# Altium PCB FLX5.PcbDoc (part 1 of 4)
Units mm, origin at the board's own origin, x right, y up, seen from the top; angles counter-clockwise.
Board outline 45.2 x 54.5 mm, 4 copper layers (Top Layer, gndplane, vplane, Bottom Layer), stack 1.596 mm thick; 151 components, 82 nets, 455 pads, 132 vias.
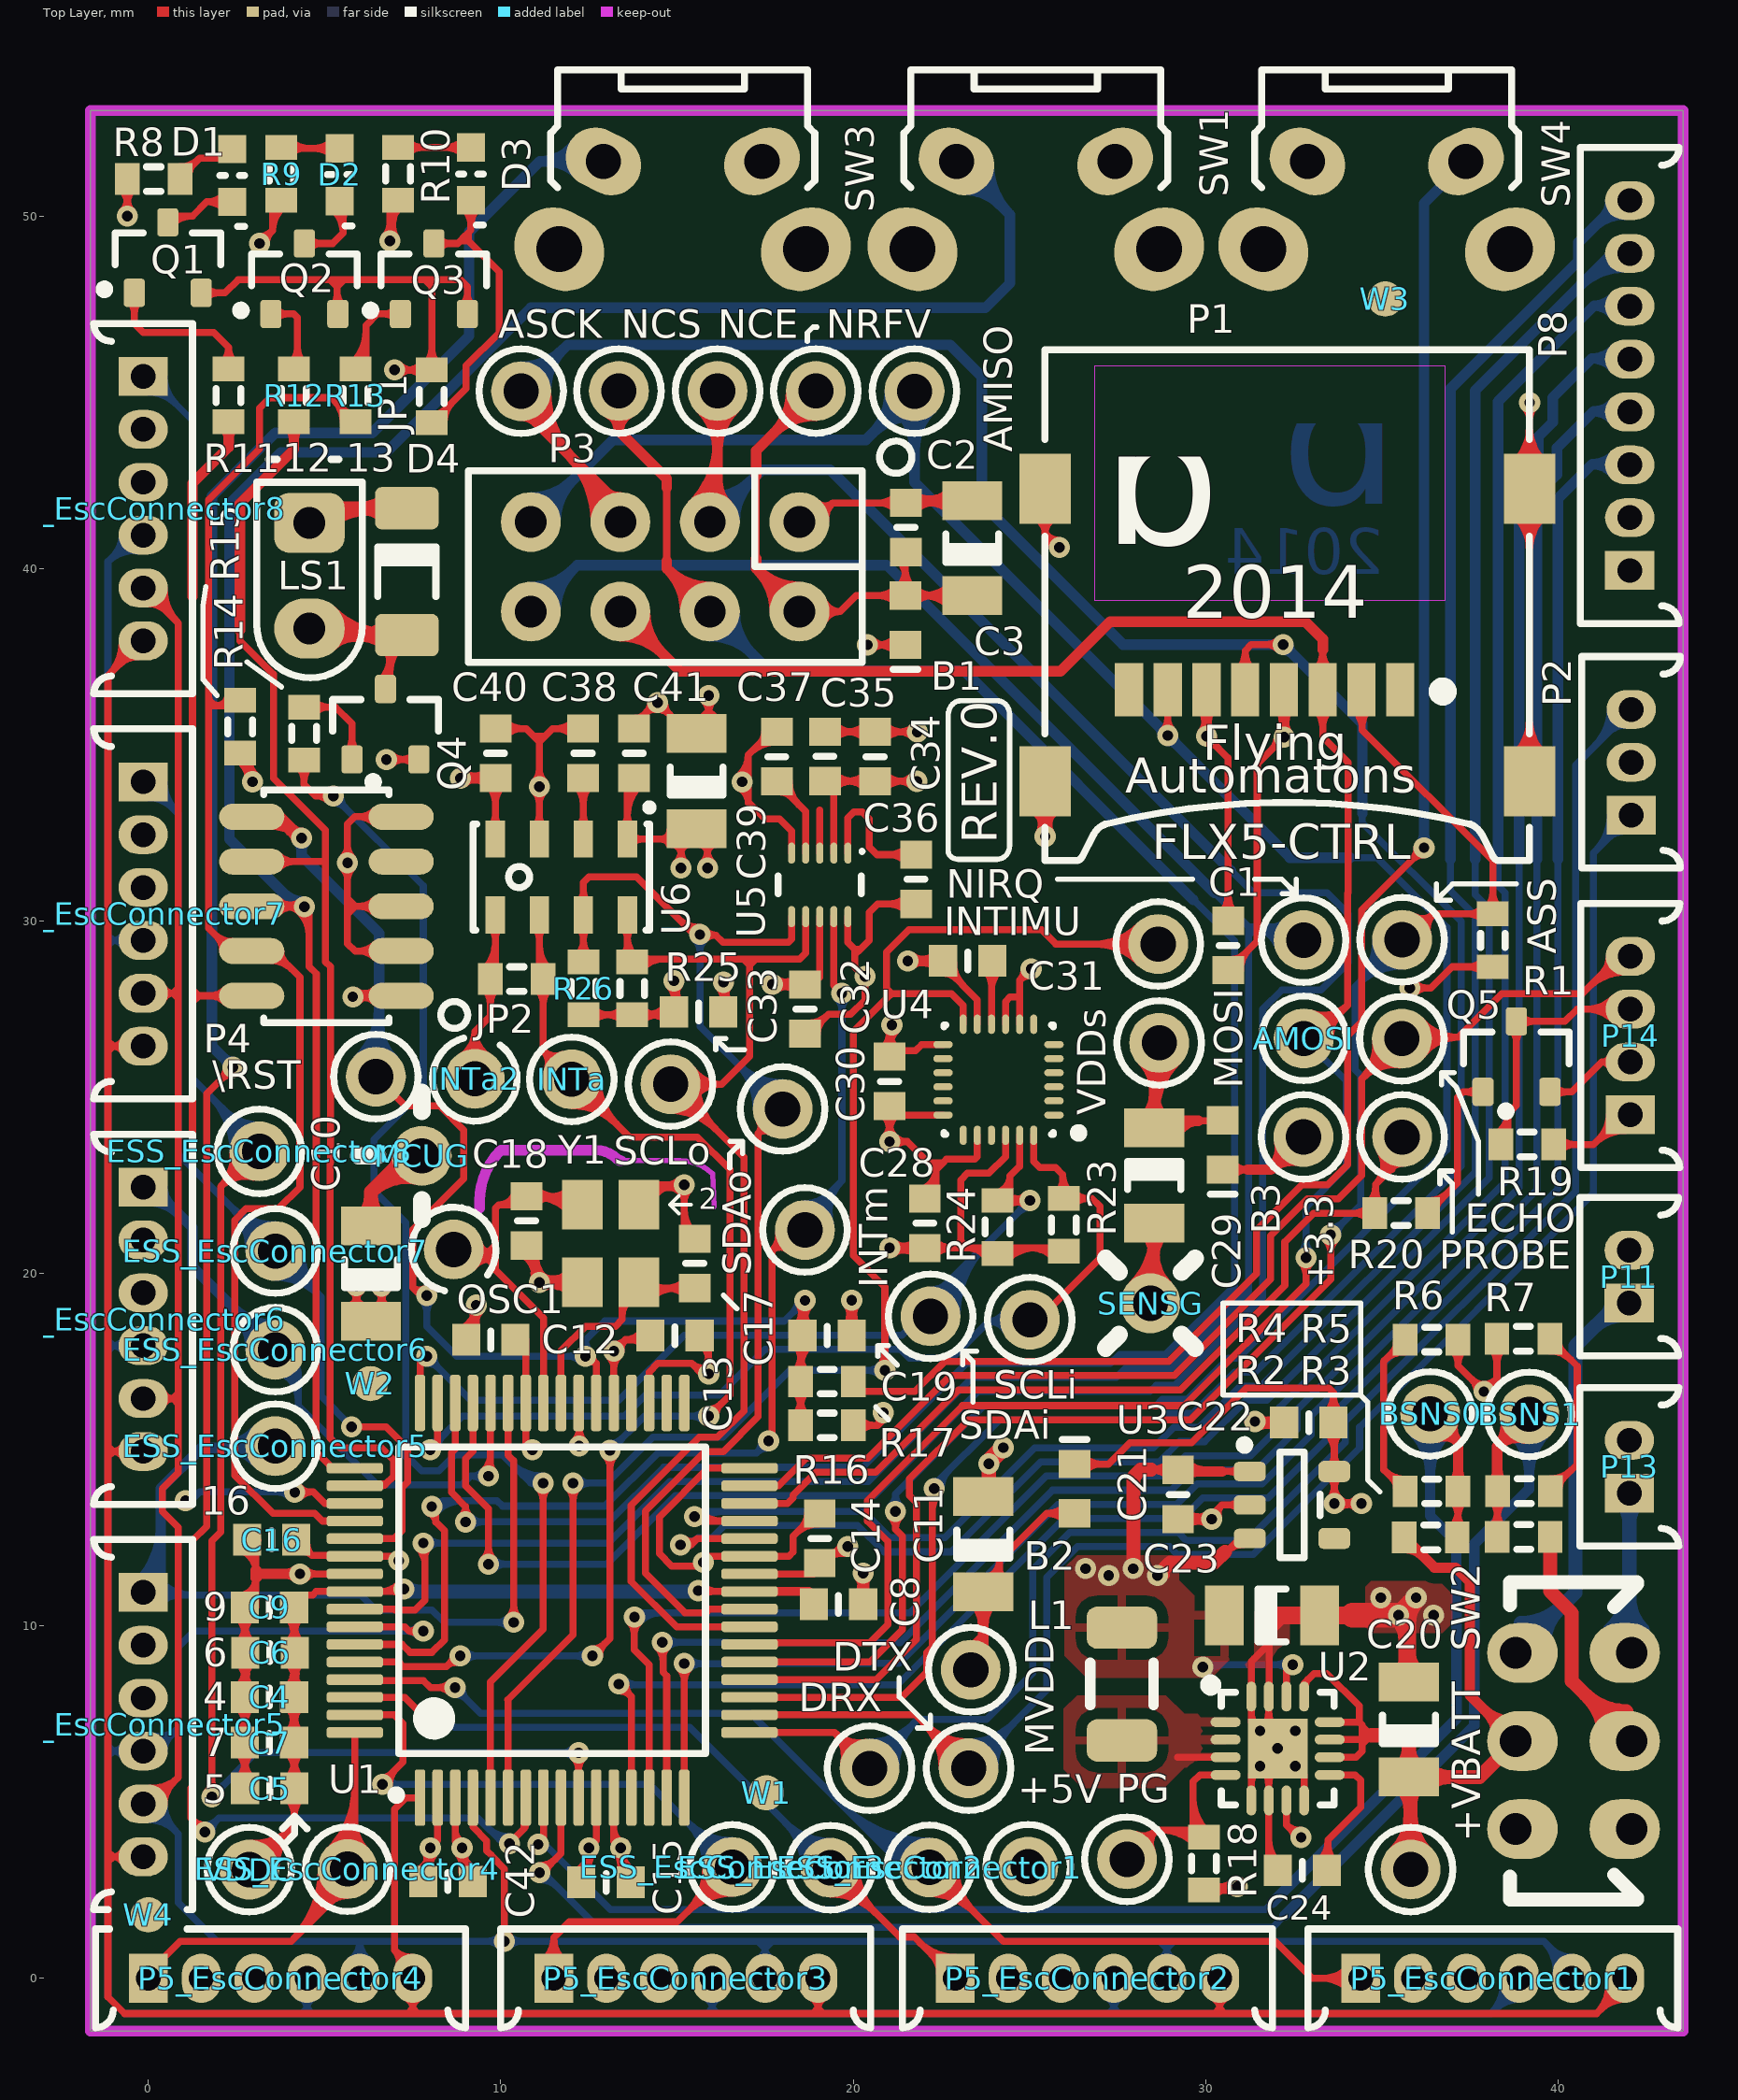
[diagram p0: Top Layer view]
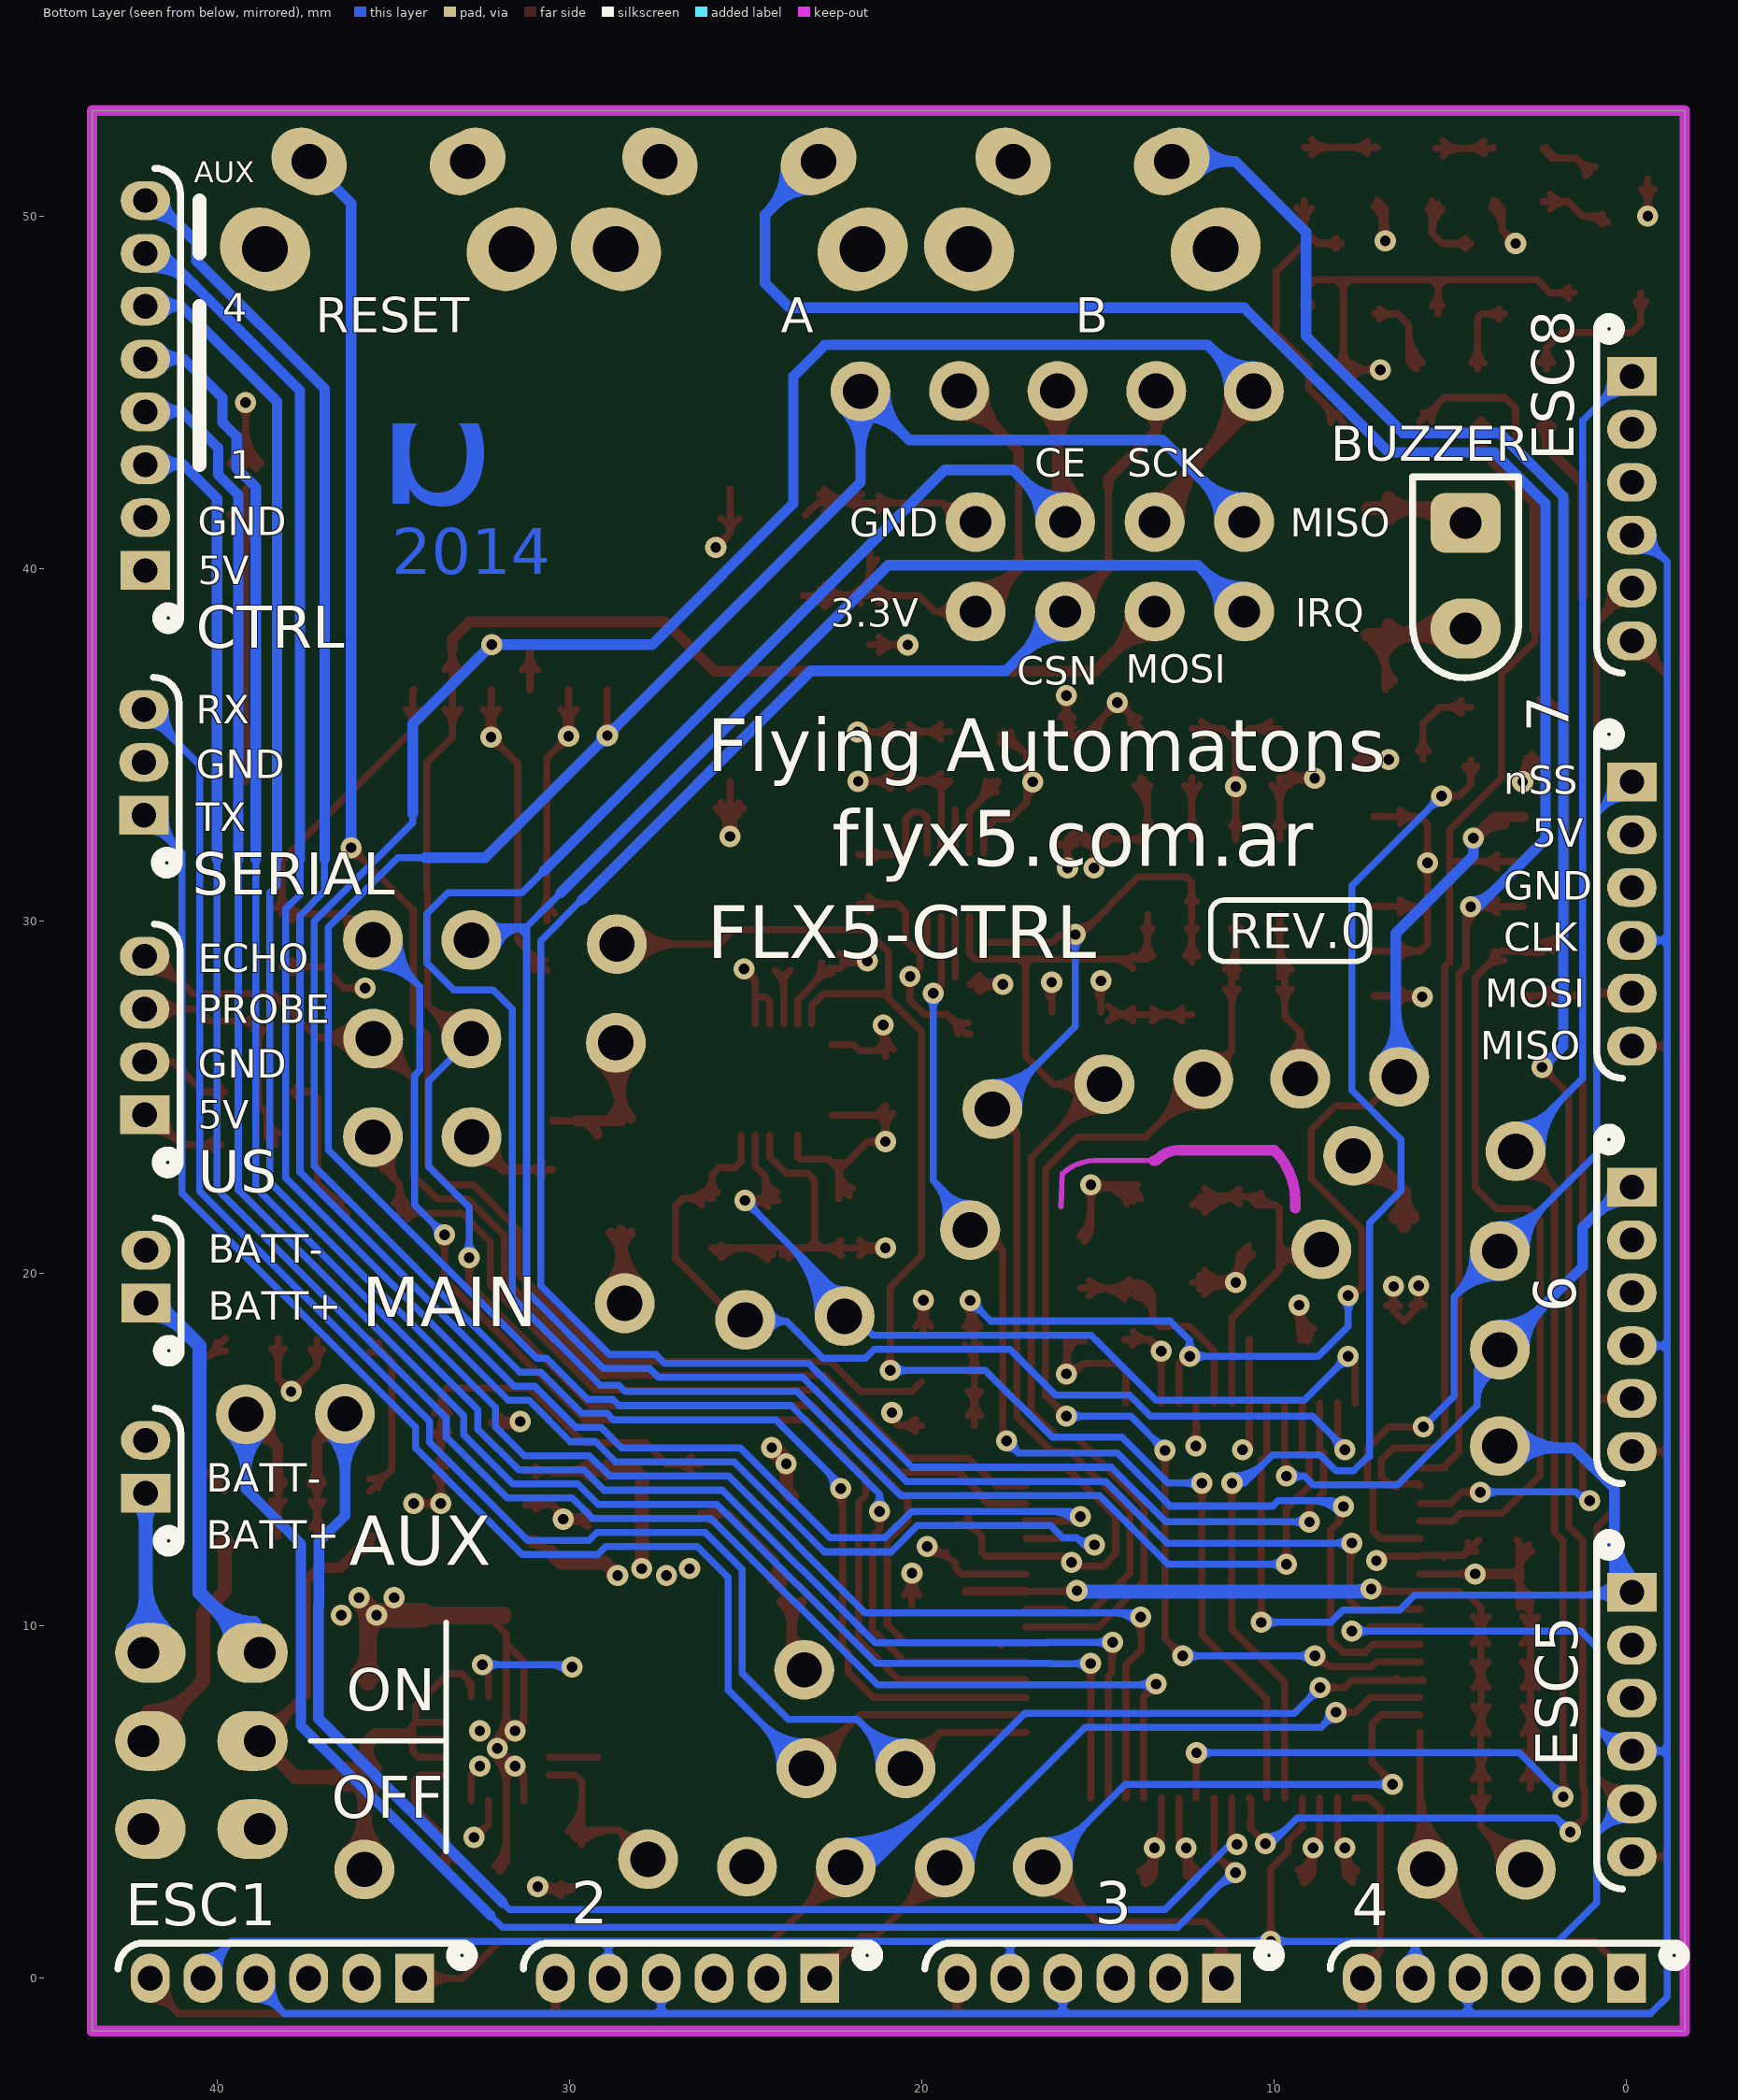
[diagram p1: Bottom Layer view, seen from below]
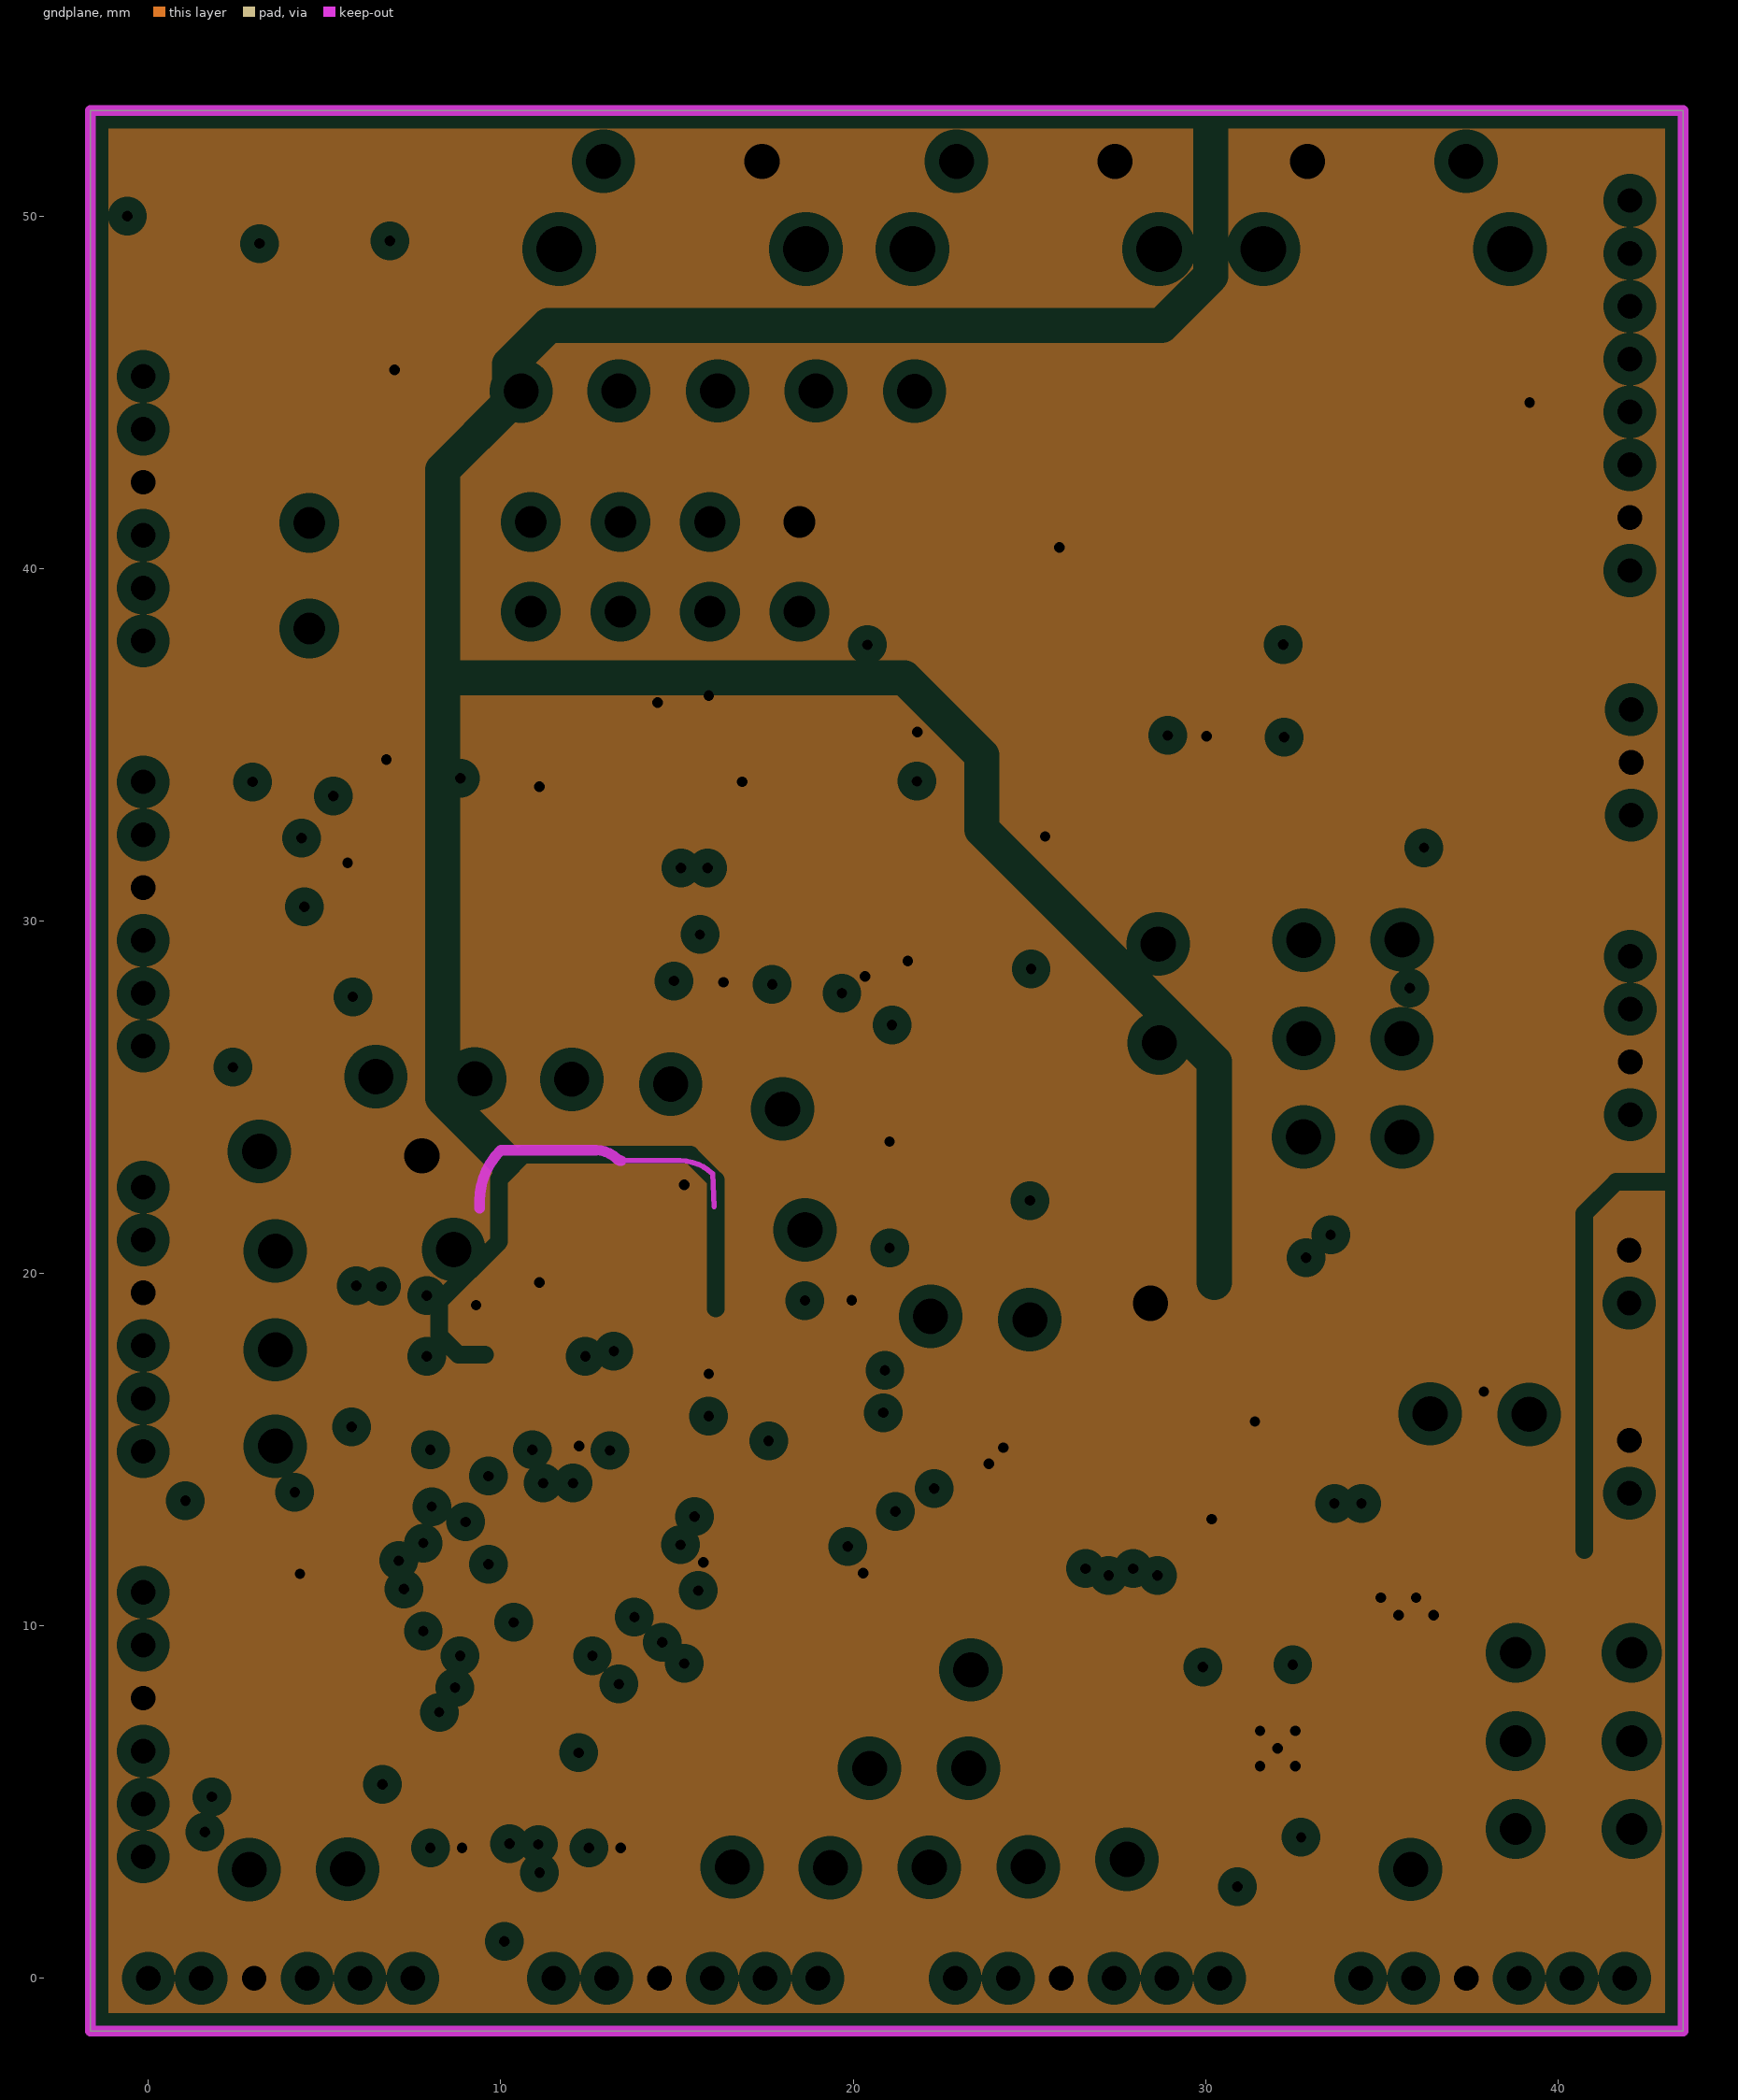
[diagram p2: gndplane, clearances drawn from the general rule]
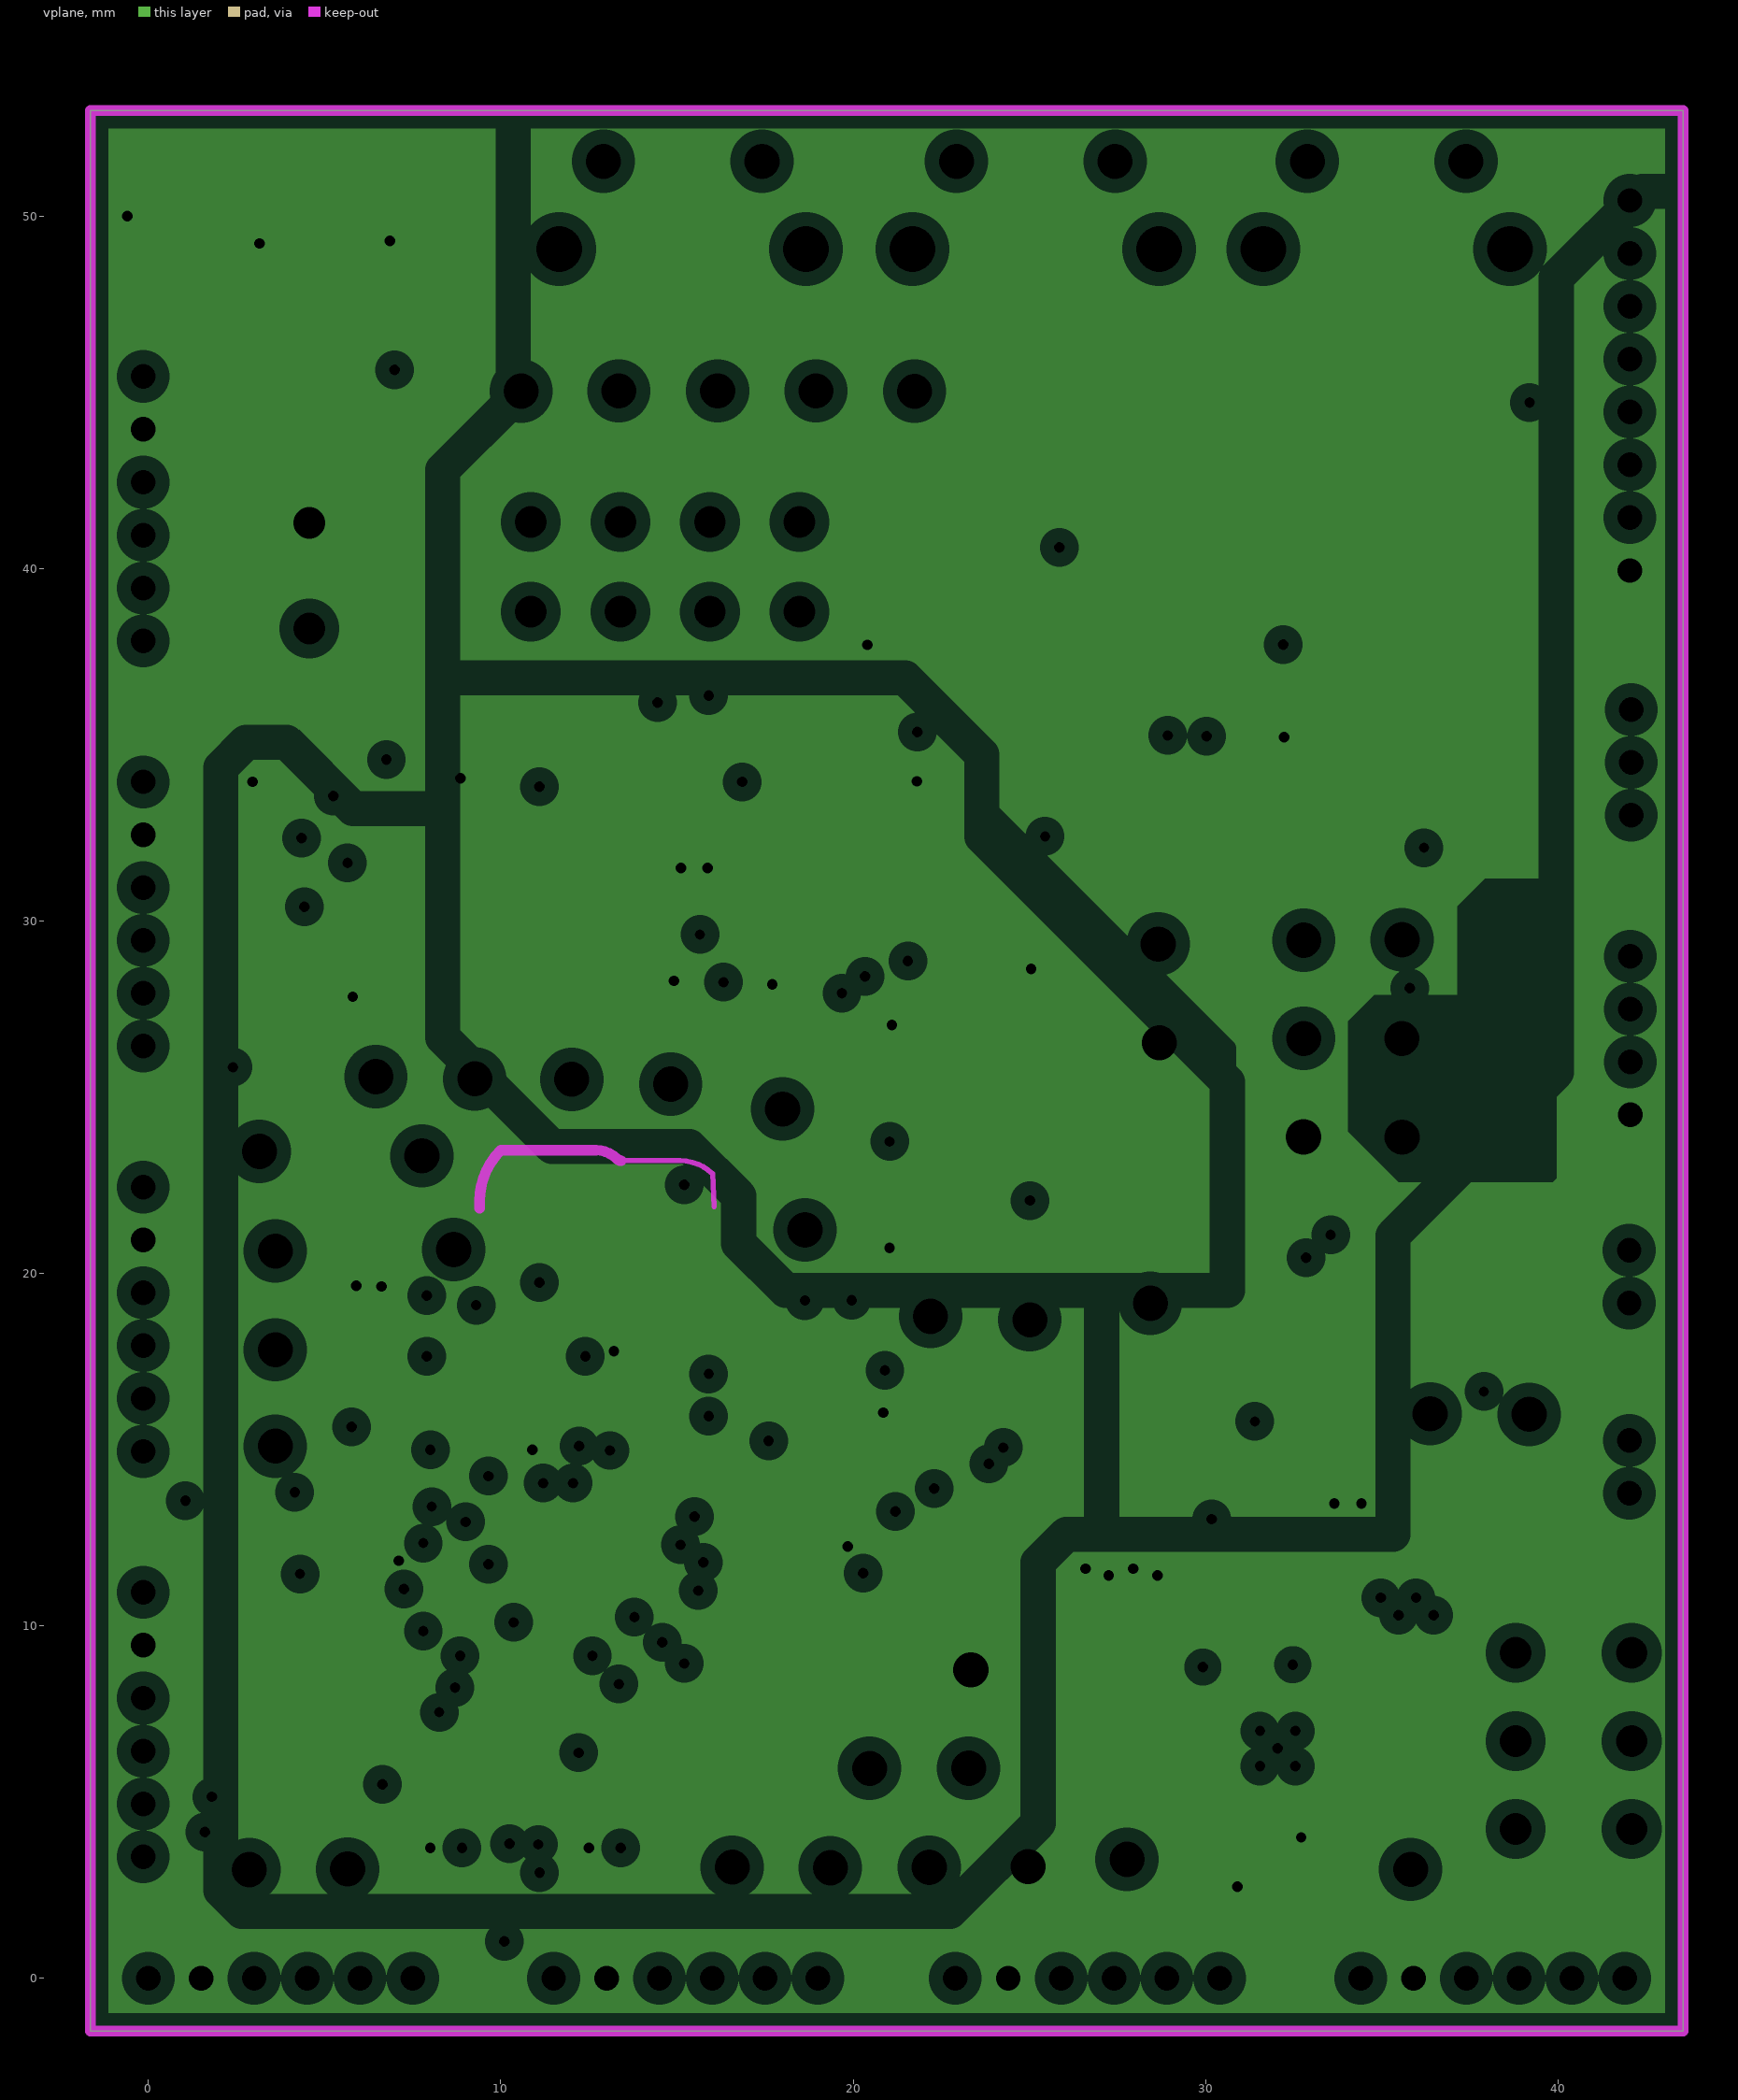
[diagram p3: vplane, clearances drawn from the general rule]

## Layer stack, top to bottom
Top Layer: signal copper 0.0356
Dielectric: prepreg 0.127, FR-4, Dk 4.8
gndplane: plane copper 0.0356, net GND
Dielectric: core 1.2, FR-4, Dk 4.8
vplane: plane copper 0.0356, net (Multiple Nets)
Dielectric: prepreg 0.127, FR-4, Dk 4.8
Bottom Layer: signal copper 0.0356

## Board outline
-1.65,-1.5 43.55,-1.5 43.55,53 -1.65,53

## Design rules (kind name [scope] priority, off if disabled: settings)
AcuteAngle AcuteAngle_small [IsWire and (Width  <= 0.2)] p1: minimum=9.00000000000000E+0001 checktracksonly=FALSE
AcuteAngle [not (IsWire and (Width  <= 0.2))] p2: minimum=6.00000000000000E+0001 checktracksonly=FALSE
AssemblyTestPointUsage [All] p1: valid=2 allowmultiple=TRUE
Clearance Clearance_Poly [All vs inpolygon] p1: gap=0.3
Clearance [All] p2: gap=0.2
ComponentClearance [Not HasFootprint('FIDUCIAL_DOT_M1D2O') vs Not HasFootprint('FIDUCIAL_DOT_M1D2O')] p1: gap=0.25 collisioncheckmode=3 verticalgap=1 showdistances=TRUE
ComponentOrientations [All] p1: allowedrotations=32
FabricationTestPointUsage [All] p1: valid=2 allowmultiple=TRUE
Height [All] p1: minheight=0 maxheight=20 prefheight=10
HoleSize [Not (IsPad and not PadIsPlated)] p1: absolutevalues=TRUE maxlimit=5 minlimit=0.2 maxpercent=80.000 minpercent=20.000
HoleToHoleClearance [All] p1: gap=0.2 allowstackedmicrovias=TRUE
MinimumAnnularRing [All] p1: minimumring=0.1
MinimumSolderMaskSliver [All] p1: minsoldermaskwidth=0.075
NetsToIgnore [InNet('GND')] p1:
PermittedLayers [All] p1: toplayerpermitted=TRUE bottomlayerpermitted=TRUE
PlaneClearance [All] p1: clearance=0.4
PlaneConnect PlaneConnect_Direct [isvia and not TouchesRoom('Via_on_pad1')] p1: planeconnectstyle=Direct reliefexpansion=0.508 reliefentries=4 reliefconductorwidth=0.254 reliefairgap=0.254
PlaneConnect [All] p2: planeconnectstyle=Relief reliefexpansion=0.25 reliefentries=4 reliefconductorwidth=0.25 reliefairgap=0.25
PolygonConnect PolygonConnect_Direct [isvia vs ispolygon] p1: connectstyle=Direct reliefconductorwidth=0.254 reliefentries=4 polygonreliefangle="90 Angle"
PolygonConnect [All] p2: connectstyle=Relief reliefconductorwidth=0.25 reliefentries=4 polygonreliefangle="90 Angle"
RoomDefinition Via_on_pad1 [0] p1: confinementstyle=ConfineIn formatcopy=TRUE lockcomponents=FALSE outline 22.717,15.2 24.7,15.2 24.7,13.25 22.717,13.25
RoomDefinition Sensors [InComponentClass('Sensors')] p2: confinementstyle=ConfineIn formatcopy=TRUE lockcomponents=FALSE outline 36.808,23.34 24.831,37.25 7.5,37.25 7.5,23.242 16.408,23.242 16.408,15.8 36.808,15.8
RoomDefinition [InComponentClass('Components Class 1') vs False] p3: confinementstyle=ConfineIn formatcopy=TRUE lockcomponents=FALSE outline 40.95,46.991 40.85,24.7 28.75,24.751 28.75,31 25.25,31 23.25,32.5 20.75,36.5 8.45,36.5 8.45,47
RoomDefinition Power [InComponentClass('Power')] p4: confinementstyle=ConfineIn formatcopy=TRUE lockcomponents=FALSE outline 37.85,1.2 22.25,1.2 22.25,18.6 37.85,18.6
RoomDefinition MCU [InComponentClass('MCU')] p5: confinementstyle=ConfineIn formatcopy=TRUE lockcomponents=FALSE outline 29.173,27.3 29.173,1.55 1.35,1.55 1.35,27.3
RoutingCorners [All] p1: cornerstyle=45-Degree minsetback=2.5 maxsetback=2.5
RoutingPriority [All] p1: routingpriority=5
RoutingPriority RoutingPriority_GND [InNet('GND')] p2: routingpriority=10
RoutingVias [All] p1: holewidth=0.3 width=0.6 viastyle="Through Hole" minholewidth=0.2 minwidth=0.4 maxholewidth=6 maxwidth=3
SMDNeckDown SMDNeckDown_tiny2 [ispad or Width <= 0.2] p1: percent=100.000
SMDNeckDown [All] p2: percent=50.000
SMDToCorner SMDToCorner_Exception [HasPad('U1-52') or HasPad('C9-1')] p1: distance=0
SMDToCorner [not (HasPad('U1-52') or HasPad('C9-1'))] p2: distance=59055
ShortCircuit ShortCircuit_NC [HasPad('U5-3') vs not IsElectrical] p1: allowed=TRUE
ShortCircuit [All] p2: allowed=FALSE
SilkToSilkClearance SilkToSilkOverlap [IsText and (StringText = 'Flying') vs IsText and (StringText = 'Automatons')] p1: silktosilkclearance=0
SilkToSilkClearance [All] p2: silktosilkclearance=0.05
SilkscreenOverComponentPads [All] p1: minsilkscreentomaskgap=0.1
SolderMaskExpansion "Via Tenting" [IsVia] p1: expansion=-5
SolderMaskExpansion [All] p2: expansion=0.1
Width [All] p1: maxlimit=3 minlimit=0.2 preferedwidth=0.3
14 further rules are at their usual default settings.

## Classes and differential pairs
component class EscConnector8: ESS_EscConnector8 P5_EscConnector8 P6_EscConnector8
component class EscConnector7: ESS_EscConnector7 P5_EscConnector7 P6_EscConnector7
component class EscConnector6: ESS_EscConnector6 P5_EscConnector6 P6_EscConnector6
component class EscConnector5: ESS_EscConnector5 P5_EscConnector5 P6_EscConnector5
component class EscConnector4: ESS_EscConnector4 P5_EscConnector4 P6_EscConnector4
component class EscConnector3: ESS_EscConnector3 P5_EscConnector3 P6_EscConnector3
component class EscConnector2: ESS_EscConnector2 P5_EscConnector2 P6_EscConnector2
component class EscConnector1: ESS_EscConnector1 P5_EscConnector1 P6_EscConnector1
channel class esc_connector: EscConnector1 EscConnector2 EscConnector3 EscConnector4 EscConnector5 EscConnector6 EscConnector7 EscConnector8
net class PD[0..8]: PD0 PD1 PD2 PD3 PD4 PD5 PD6 PD7
component class Power: +VBATT C20 C21 C22 C23 C24 L1 PG R18 U2 U3
net class DBGLED[0..2]: DBGLED0 DBGLED1 DBGLED2
net class BTN[0..1]: BTN0 BTN1
net class BATTM[0..1]: BATTM0 BATTM1
component class Sensors: B3 C28 C29 C30 C31 C32 C33 C34 C35 C36 C37 C38 C39 C40 C41 INTa INTa2 INTIMU INTm JP2 R23 R24 R25 R26 SCLi SCLo SDAi SDAo SENSG U4 U5 U6 VDDs
component class MCU: \RST B2 C4 C5 C6 C7 C8 C9 C10 C11 C12 C13 C14 C15 C16 C17 C18 C19 C42 MCUG MVDD OSC1 R16 R17 U1 VDDC W1 W2 Y1
component class "External Connectors": AMISO AMOSI ASCK ASS B1 BSNS0 BSNS1 C1 C2 C3 ECHO NCE NCS NIRQ NRFV P1 P2 P3 P8 P11 P13 P14 PROBE Q5 R1 R2 R3 R4 R5 R6 R7 R19 R20 SW2
component class "Debug / Interface": D1 D2 D3 D4 DRX DTX JP1 LS1 P4 Q1 Q2 Q3 Q4 R8 R9 R10 R11 R12 R13 R14 SW3 SW4
component class "Components Class 1": AMISO AMOSI ASCK ASS B1 C1 C2 C3 NCE NCS NIRQ NRFV P1 P3 R1

## Components (designator, comment, footprint, x,y, rotation, side; value= is the part's Value field where it differs from the comment)
+3.3 "TESTPOINT-ARROW-RED" G-PIN_1mm-CIRCLE 32.78,23.872 r0 top
+5V "TESTPOINT-ARROW-RED" G-PIN_1mm-CIRCLE 24.966,3.168 r0 top
+VBATT "TESTPOINT-ARROW-RED" G-PIN_1mm-CIRCLE 35.821,3.089 r0 top
\RST "TESTPOINT-ARROW-BLUE" G-PIN_1mm-CIRCLE 6.455,25.583 r270 top
AMISO "TESTPOINT-ARROW-BLUE" G-PIN_1mm-CIRCLE 21.741,45.032 r270 top
AMOSI "TESTPOINT-ARROW-BLUE" G-PIN_1mm-CIRCLE 32.788,26.669 r90 top
ASCK "TESTPOINT-ARROW-BLUE" G-PIN_1mm-CIRCLE 10.578,45.034 r270 top
ASS "TESTPOINT-ARROW-BLUE" G-PIN_1mm-CIRCLE 35.578,29.467 r0 top
B1 "80 Ohm @ 100MHz" INDC1608L 21.483,38.537 r90 top
B2 "80 Ohm @ 100MHz" INDC1608L 26.278,13.892 r270 top
B3 "80 Ohm @ 100MHz" INDC1608L 30.483,23.646 r90 top
BSNS0 "TESTPOINT-ARROW-BLUE" G-PIN_1mm-CIRCLE 36.375,16.017 r270 top
BSNS1 "TESTPOINT-ARROW-BLUE" G-PIN_1mm-CIRCLE 39.186,16.003 r270 top
C1 "100nF" CAPC1608L 30.641,29.305 r90 top
C2 "100nF" CAPC1608L 21.495,41.166 r90 top
C3 "10uF" CAPC3216L 23.379,40.579 r90 top
C4 "1uF" CAPC1608L 3.432,7.982 r180 top
C5 "1uF" CAPC1608L 3.44,5.389 r180 top
C6 "100nF" CAPC1608L 3.45,9.239 r180 top
C7 "1uF" CAPC1608L 3.434,6.689 r180 top
C8 "100nF" CAPC1608L 19.584,10.611 r0 top
C9 "100nF" CAPC1608L 3.434,10.525 r180 top
C10 "10uF" CAPC3216L 6.316,19.997 r90 top
C11 "10uF" CAPC3216L 23.692,12.318 r90 top
C12 "100nF" CAPC1608L 9.716,18.114 r180 top
C13 "100nF" CAPC1608L 14.942,18.233 r0 top
C14 "100nF" CAPC1608L 19.05,12.484 r90 top
C15 "100nF" CAPC1608L 12.986,2.721 r0 top
C16 "100nF" CAPC1608L 3.497,12.442 r180 top
C17 "15pF" CAPC1608L 15.505,20.286 r90 top
C18 "15pF" CAPC1608L 10.73,21.489 r270 top
C19 "15nF" CAPC1608L 19.259,18.239 r0 top
C20 "10uF" CAPC3216L 35.771,7.064 r90 top
C21 "1uF" CAPC1608L 29.22,13.729 r270 top
C22 "1uF" CAPC1608L 32.93,15.769 r180 top
C23 "22uF" CAPC3216L 31.883,10.3 r0 top
C24 "680pF" CAPC1608L 32.747,3.064 r180 top
C28 "15nF" CAPC1608L 22.033,21.423 r90 top
C29 "10uF" CAPC3216L 28.544,22.782 r270 top
C30 "100nF" CAPC1608L 21.035,25.451 r270 top
C31 "100nF" CAPC1608L 23.25,28.868 r0 top
C32 "100nF" CAPC1608L 18.633,27.5 r270 top
C33 "15nF" CAPC1608L 15.616,27.421 r0 top
C34 "1uF" CAPC1608L 20.622,34.666 r90 top
C35 "100nF" CAPC1608L 19.199,34.673 r90 top
C36 "100nF" CAPC1608L 21.783,31.182 r270 top
C37 "100nF" CAPC1608L 17.833,34.666 r90 top
C38 "100nF" CAPC1608L 12.333,34.759 r90 top
C39 "10uF" CAPC3216L 15.559,33.972 r90 top
C40 "100nF" CAPC1608L 9.851,34.759 r90 top
C41 "100nF" CAPC1608L 13.783,34.759 r90 top
C42 "100nF" CAPC1608L 8.501,2.745 r0 top
D1 "LED-GREEN" DSO-F2/D3.4 2.378,51.156 r270 top
D2 "LED-RED" DSO-F2/D3.4 5.428,51.175 r270 top
D3 "LED-YELLOW" DSO-F2/D3.4 9.15,51.2 r270 top
D4 "DIODE" SOD-80 7.333,39.912 r90 top
DRX "TESTPOINT-ARROW-BLUE" G-PIN_1mm-CIRCLE 20.467,5.958 r0 top
DTX "TESTPOINT-ARROW-BLUE" G-PIN_1mm-CIRCLE 23.277,5.961 r0 top
ECHO "TESTPOINT-ARROW-BLUE" G-PIN_1mm-CIRCLE 35.571,26.663 r180 top
ESS_EscConnector1 "TESTPOINT-ARROW-BLUE" G-PIN_1mm-CIRCLE 22.162,3.149 r0 top (schematic designator ESS)
ESS_EscConnector2 "TESTPOINT-ARROW-BLUE" G-PIN_1mm-CIRCLE 19.352,3.139 r0 top (schematic designator ESS)
ESS_EscConnector3 "TESTPOINT-ARROW-BLUE" G-PIN_1mm-CIRCLE 16.568,3.158 r0 top (schematic designator ESS)
ESS_EscConnector4 "TESTPOINT-ARROW-BLUE" G-PIN_1mm-CIRCLE 5.65,3.1 r0 top (schematic designator ESS)
ESS_EscConnector5 "TESTPOINT-ARROW-BLUE" G-PIN_1mm-CIRCLE 3.6,15.1 r270 top (schematic designator ESS)
ESS_EscConnector6 "TESTPOINT-ARROW-BLUE" G-PIN_1mm-CIRCLE 3.6,17.836 r270 top (schematic designator ESS)
ESS_EscConnector7 "TESTPOINT-ARROW-BLUE" G-PIN_1mm-CIRCLE 3.6,20.636 r270 top (schematic designator ESS)
ESS_EscConnector8 "TESTPOINT-ARROW-BLUE" G-PIN_1mm-CIRCLE 3.15,23.464 r270 top (schematic designator ESS)
INTa "TESTPOINT-ARROW-BLUE" G-PIN_1mm-CIRCLE 12.013,25.51 r180 top
INTa2 "TESTPOINT-ARROW-BLUE" G-PIN_1mm-CIRCLE 9.263,25.522 r180 top
INTIMU "TESTPOINT-ARROW-BLUE" G-PIN_1mm-CIRCLE 28.656,29.347 r180 top
INTm "TESTPOINT-ARROW-BLUE" G-PIN_1mm-CIRCLE 18.632,21.234 r180 top
JP1 "0" RESC1608L 8.04,44.886 r90 top
JP2 "0" RESC1608L 10.453,28.35 r180 top
L1 "2.2uH" X-TDK_FLF3215 27.625,8.35 r90 top
LS1 "Value" TWO_WIRE_HOLE_M0.9D3P 4.569,39.8 r270 top
MCUG "TESTPOINT-CIRCLE-GREEN" G-PIN_1mm-CROSS 7.758,23.338 r45 top
MVDD "TESTPOINT-ARROW-RED" G-PIN_1mm-CIRCLE 23.337,8.754 r270 top
NCE "TESTPOINT-ARROW-BLUE" G-PIN_1mm-CIRCLE 16.151,45.041 r0 top
NCS "TESTPOINT-ARROW-BLUE" G-PIN_1mm-CIRCLE 13.35,45.041 r0 top
NIRQ "TESTPOINT-ARROW-BLUE" G-PIN_1mm-CIRCLE 32.786,29.458 r270 top
NRFV "TESTPOINT-ARROW-BLUE" G-PIN_1mm-CIRCLE 18.943,45.041 r90 top
OSC1 "TESTPOINT-ARROW-BLUE" G-PIN_1mm-CIRCLE 8.663,20.681 r270 top
P1 "MICRO_SD-4_MOUNT" X-MOLX_472192001 31.677,36.563 r180 top
P2 "HEADER-3x1" X-JST-S3B-ZR 42.079,34.504 r90 top
P3 "HEADER-4x2S" G-HEADER_4x2I.1P_TH 14.664,40.052 r270 top
P4 "HEADER-5x2S" G-HEADER_5x2I.05P_SM 5.052,30.418 r180 top
P5_EscConnector1 "HEADER-6x1" X-JST-S6B-ZR 38.15,0 r0 top (schematic designator P5)
P5_EscConnector2 "HEADER-6x1" X-JST-S6B-ZR 26.65,0 r0 top (schematic designator P5)
P5_EscConnector3 "HEADER-6x1" X-JST-S6B-ZR 15.25,0 r0 top (schematic designator P5)
P5_EscConnector4 "HEADER-6x1" X-JST-S6B-ZR 3.75,0 r0 top (schematic designator P5)
P5_EscConnector5 "HEADER-6x1" X-JST-S6B-ZR -0.15,7.2 r270 top (schematic designator P5)
P5_EscConnector6 "HEADER-6x1" X-JST-S6B-ZR -0.15,18.7 r270 top (schematic designator P5)
P5_EscConnector7 "HEADER-6x1" X-JST-S6B-ZR -0.15,30.2 r270 top (schematic designator P5)
P5_EscConnector8 "HEADER-6x1" X-JST-S6B-ZR -0.15,41.7 r270 top (schematic designator P5)
P8 "HEADER-8x1" X-JST-S8B-ZR 42.038,45.194 r90 top
P11 "HEADER-2x1" X-JST-S2B-ZR 42.021,19.908 r90 top
P13 "HEADER-2x1" X-JST-S2B-ZR 42.028,14.515 r90 top
P14 "HEADER-4x1" X-JST-S4B-ZR 42.054,26.75 r90 top
PG "TESTPOINT-ARROW-BLUE" G-PIN_1mm-CIRCLE 27.771,3.378 r0 top
PROBE "TESTPOINT-ARROW-BLUE" G-PIN_1mm-CIRCLE 35.58,23.871 r180 top
Q1 "BJT-NPN-BEC" SOT23-3L 0.55,48.825 r90 top
Q2 "BJT-NPN-BEC" SOT23-3L 4.425,48.225 r90 top
Q3 "BJT-NPN-BEC" SOT23-3L 8.1,48.225 r90 top
Q4 "BJT-NPN-BEC" SOT23-3L 6.727,35.585 r90 top
Q5 "BJT-NPN-BEC" SOT23-3L 38.823,26.153 r90 top
R1 "10K" RESC1608L 38.155,29.451 r270 top
R2 "10K" RESC1608L 36.391,12.51 r0 top
R3 "10K" RESC1608L 39.03,12.525 r180 top
R4 "1K" RESC1608L 36.417,13.817 r180 top
R5 "1K" RESC1608L 39.041,13.825 r0 top
R6 "1K" RESC1608L 36.417,18.125 r0 top
R7 "1K" RESC1608L 39.02,18.15 r180 top
R8 "150" RESC1608L 0.15,51.05 r0 top
R9 "150" RESC1608L 3.774,51.2 r90 top
R10 "150" RESC1608L 7.081,51.2 r90 top
R11 "10K" RESC1608L 2.275,44.914 r270 top
R12 "10K" RESC1608L 4.128,44.914 r270 top
R13 "10K" RESC1608L 5.875,44.914 r270 top
R14 "3.3K" RESC1608L 4.416,35.321 r270 top
R15 "10K" RESC1608L 2.606,35.512 r90 top
R16 "10K" RESC1608L 19.259,15.688 r180 top
R17 "100" RESC1608L 19.259,16.933 r0 top
R18 "100K" RESC1608L 29.951,3.257 r90 top
R19 "3.3K" RESC1608L 39.129,23.658 r180 top
R20 "118K" RESC1608L 35.552,21.712 r180 top
R23 "3.3K" RESC1608L 25.975,21.378 r90 top
R24 "3.3K" RESC1608L 24.099,21.321 r90 top
R25 "3.3K" RESC1608L 13.732,28.087 r90 top
R26 "3.3K" RESC1608L 12.346,28.088 r90 top
SCLi "TESTPOINT-ARROW-BLUE" G-PIN_1mm-CIRCLE 25.015,18.685 r0 top
SCLo "TESTPOINT-ARROW-BLUE" G-PIN_1mm-CIRCLE 14.819,25.371 r180 top
SDAi "TESTPOINT-ARROW-BLUE" G-PIN_1mm-CIRCLE 22.195,18.784 r0 top
SDAo "TESTPOINT-ARROW-BLUE" G-PIN_1mm-CIRCLE 17.998,24.666 r180 top
SENSG "TESTPOINT-CIRCLE-GREEN" G-PIN_1mm-CROSS 28.434,19.154 r180 top
SW1 "SWITCH_TACTILE_SPST-2T-NO" G-SWITCH-M7.1x6.6AS3.25-2T_TH 35.141,51.554 r180 top
SW2 "SWITCH-SLIDE-DPDT-LNK" X-CKC_JS202011AQN 40.445,6.733 r90 top
SW3 "SWITCH_TACTILE_SPST-2T-NO" G-SWITCH-M7.1x6.6AS3.25-2T_TH 15.161,51.554 r180 top
SW4 "SWITCH_TACTILE_SPST-2T-NO" G-SWITCH-M7.1x6.6AS3.25-2T_TH 25.183,51.554 r180 top
U1 "TM4C1237xxPM" JEDEC_MS-026ACD(D) 11.458,10.725 r90 top
U2 "TPS6215x" JEDEC_MO-220VEED-4 32.046,6.521 r0 top
U3 "LREG_3T_5pinA_EN_3.3V" JEDEC_MO-178AA 32.456,13.432 r0 top
U4 "MPU-6500" QFN40P300X300X95-24N 24.124,25.496 r180 top
U5 "MAG3110" SON40P200X200X80-10WL 19.051,31.025 r270 top
U6 "MPL3115A2" x-FREE_2053-01(LGA8) 11.717,31.247 r270 top
VDDC "TESTPOINT-ARROW-RED" G-PIN_1mm-CIRCLE 2.862,3.083 r270 top
VDDs "TESTPOINT-ARROW-RED" G-PIN_1mm-CIRCLE 28.686,26.544 r180 top
W1 "IPC Fiducial Dot" FIDUCIAL_DOT_M1D2O 17.535,5.263 r0 top
W2 "IPC Fiducial Dot" FIDUCIAL_DOT_M1D2O 6.3,16.875 r0 top
W3 "IPC Fiducial Dot" FIDUCIAL_DOT_M1D2O 35.1,47.65 r0 top
W4 "IPC Fiducial Dot" FIDUCIAL_DOT_M1D2O -0.002,1.8 r0 top
Y1 "20MHz" X-EPSO_TSX-3225 13.116,20.848 r180 top

## Footprints (in the part's own frame and the unit in brackets; to place one, negate y for a bottom-side part, rotate by r counter-clockwise, add the part's x,y. Pads: shape width x height; smd on the part's side, far side on the other; paste and mask are expansions set on the pad)
CAPC1608L [mm] "Chip Capacitor, Body 1.6x0.8mm, IPC High Density"
  rect 0.8x0.9 smd: 1(-0.7,0) 2(0.7,0)
  silkscreen extent 0,-0.25 0,0.25, body extent -0.87,-0.48 0.87,0.48, height 0.85
CAPC3216L [mm] "Chip Capacitor, Body 3.2x1.6mm, IPC High Density"
  rect 1.1x1.7 smd: 1(-1.35,0) 2(1.35,0)
  silkscreen extent -0.4,-0.75 0.4,0.75, body extent -1.7,-0.9 1.7,0.9, height 1.35
DSO-F2/D3.4 [mm] "SM LED; 2 Flat Leads"
  rect 0.8x0.8 smd: 1(-0.75,0) 2(0.75,0)
  silkscreen extent 0,-0.35 1.45,0.35, body extent -0.81,-0.36 0.81,0.36, height 0.39
FIDUCIAL_DOT_M1D2O [mm] "1mm fiducial dot, 2mm mask opening"
  round 1 smd paste-1 mask+0.5: 1(0,0)
G-HEADER_4x2I.1P_TH [mm] "Header 4x2, 100 mil Pitch, Non polarized"
  round 1.7 hole 0.9: 1(-1.27,3.81) 2(1.27,3.81) 3(-1.27,1.27) 4(1.27,1.27) 5(-1.27,-1.27) 6(1.27,-1.27) 7(-1.27,-3.81) 8(1.27,-3.81)
  silkscreen extent -3.57,-5.59 2.72,7, body extent -2.72,-5.59 2.72,5.59, height 8.5
G-HEADER_5x2I.05P_SM [mm] "Header; 5x2 .05'' Pitch, SMD"
  oval 1.85x0.74 smd: 1(-2.121,2.54) 2(2.121,2.54) 3(-2.121,1.27) 4(2.121,1.27) 5(-2.121,0) 6(2.121,0) 7(-2.121,-1.27) 8(2.121,-1.27) 9(-2.121,-2.54) 10(2.121,-2.54)
  silkscreen extent -4.01,-3.3 1.78,3.46, body extent -2.71,-3.18 2.79,3.17, height 4.48
G-PIN_1mm-CIRCLE [mm]
  round 1.7 hole 1: 1(0,0)
  silkscreen extent -1.2,-1.2 1.2,1.2, body extent -0.5,-0.5 0.5,0.5, height 4.5
G-PIN_1mm-CROSS [mm] "Generic pin, 1.5 mm"
  round 1.7 hole 1: 1(0,0)
  silkscreen extent -1.27,-1.27 1.27,1.27, body extent -0.5,-0.5 0.5,0.5, height 4.5
G-SWITCH-M7.1x6.6AS3.25-2T_TH [mm] "Switch Tactile, Side actuated, Thru hole"
  oval 2.2x1.7 hole 1 rot 26.6: 1(-2.25,0)
  oval 2.2x1.7 hole 1 rot 153.4: 2(2.25,0)
  oval 2.6x2.2 hole 1.3 rot 26.6: MOUNT1(-3.5,2.49)
  oval 2.6x2.2 hole 1.3 rot 153.4: MOUNT2(3.5,2.49)
  silkscreen extent -3.75,-2.6 3.75,0.75, body extent -4.2,-5.77 4.2,4.07, height 7
INDC1608L [mm] "Chip Inductor, Body 1.6x0.8mm, IPC High Density"
  rect 0.8x0.9 smd: 1(-0.7,0) 2(0.7,0)
  silkscreen extent -1.4,-0.35 -1.4,0.35, body extent -0.87,-0.48 0.87,0.48, height 0.71
JEDEC_MO-178AA [mm] "SOT753, 5-Leads, Body 3x1.6mm, Pitch 0.95mm, Lead Span 2.8mm, IPC High Density"
  rrect50% 0.9x0.55 smd: 1(-1.2,0.95) 2(-1.2,0) 3(-1.2,-0.95)
  rrect50% 0.9x0.6 smd: 4(1.2,-0.95) 5(1.2,0.95)
  silkscreen extent -1.47,-1.5 0.8,1.82, body extent -0.8,-1.5 0.8,1.5, height 1.1
JEDEC_MO-220VEED-4 [mm] "QFN, 3x3mm, 16 lead, exposed pad"
  oval 0.85x0.28 smd mask+0.07: 1(-1.475,0.75) 2(-1.475,0.25) 3(-1.475,-0.25) 4(-1.475,-0.75) 9(1.475,-0.75) 10(1.475,-0.25) 11(1.475,0.25) 12(1.475,0.75)
  oval 0.28x0.85 smd mask+0.07: 5(-0.75,-1.475) 6(-0.25,-1.475) 7(0.25,-1.475) 8(0.75,-1.475) 13(0.75,1.475) 14(0.25,1.475) 15(-0.25,1.475) 16(-0.75,1.475)
  rect 1.7x1.7 smd paste-5 mask+0.05: 17(0,0)
  silkscreen extent -2,-1.6 1.6,1.9, body extent -1.5,-1.5 1.5,1.5, height 1
JEDEC_MS-026ACD(D) [mm] "Thin QFP, 64-Leads, Body 10x10mm, Pitch 0.5mm, IPC High Density"
  rrect50% 1.6x0.3 smd: 1(-5.6,3.75) 2(-5.6,3.25) 3(-5.6,2.75) 4(-5.6,2.25) 5(-5.6,1.75) 6(-5.6,1.25) 7(-5.6,0.75) 8(-5.6,0.25) 9(-5.6,-0.25) 10(-5.6,-0.75) 11(-5.6,-1.25) 12(-5.6,-1.75) 13(-5.6,-2.25) 14(-5.6,-2.75) 15(-5.6,-3.25) 16(-5.6,-3.75) 33(5.6,-3.75) 34(5.6,-3.25) 35(5.6,-2.75) 36(5.6,-2.25) 37(5.6,-1.75) 38(5.6,-1.25) 39(5.6,-0.75) 40(5.6,-0.25) 41(5.6,0.25) 42(5.6,0.75) 43(5.6,1.25) 44(5.6,1.75) 45(5.6,2.25) 46(5.6,2.75) 47(5.6,3.25) 48(5.6,3.75)
  rrect50% 0.3x1.6 smd: 17(-3.75,-5.6) 18(-3.25,-5.6) 19(-2.75,-5.6) 20(-2.25,-5.6) 21(-1.75,-5.6) 22(-1.25,-5.6) 23(-0.75,-5.6) 24(-0.25,-5.6) 25(0.25,-5.6) 26(0.75,-5.6) 27(1.25,-5.6) 28(1.75,-5.6) 29(2.25,-5.6) 30(2.75,-5.6) 31(3.25,-5.6) 32(3.75,-5.6) 49(3.75,5.6) 50(3.25,5.6) 51(2.75,5.6) 52(2.25,5.6) 53(1.75,5.6) 54(1.25,5.6) 55(0.75,5.6) 56(0.25,5.6) 57(-0.25,5.6) 58(-0.75,5.6) 59(-1.25,5.6) 60(-1.75,5.6) 61(-2.25,5.6) 62(-2.75,5.6) 63(-3.25,5.6) 64(-3.75,5.6)
  silkscreen extent -5.65,-4.35 4.35,4.55, body extent -5,-5 5,5, height 1.6
QFN40P300X300X95-24N [mm] "QFN, 24-Leads, Body 3.1x3.1mm (max), Pitch 0.40mm, IPC Medium Density"
  oval 0.55x0.2 smd: 1(-1.575,1) 2(-1.575,0.6) 3(-1.575,0.2) 4(-1.575,-0.2) 5(-1.575,-0.6) 6(-1.575,-1) 13(1.575,-1) 14(1.575,-0.6) 15(1.575,-0.2) 16(1.575,0.2) 17(1.575,0.6) 18(1.575,1)
  oval 0.2x0.55 smd: 7(-1,-1.575) 8(-0.6,-1.575) 9(-0.2,-1.575) 10(0.2,-1.575) 11(0.6,-1.575) 12(1,-1.575) 19(1,1.575) 20(0.6,1.575) 21(0.2,1.575) 22(-0.2,1.575) 23(-0.6,1.575) 24(-1,1.575)
  silkscreen extent -2.4,-1.55 1.55,1.63, body extent -1.55,-1.55 1.55,1.55, height 0.95
RESC1608L [mm] "Chip Resistor, Body 1.6x0.8mm, IPC High Density"
  rect 0.7x0.9 smd: 1(-0.75,0) 2(0.75,0)
  silkscreen extent -0.2,-0.35 0.2,0.35, body extent -0.85,-0.48 0.85,0.48, height 0.6
SOD-80 [mm] "MELF Diode, 2-Leads, Body 3.4x1.4mm, IPC Medium Density"
  rrect30% 1.2x1.8 smd: 1(-1.8,0) 2(1.8,0)
  silkscreen extent -0.7,-0.82 0.7,0.83, body extent -1.8,-0.75 1.8,0.75, height 1.5
SON40P200X200X80-10WL [mm] "SON, 10-Leads, Body 2x2 mm, Pitch 0.4mm, IPC High Density"
  oval 0.6x0.2 smd paste-0.01 mask+0.05: 1(-0.9,0.8) 2(-0.9,0.4) 3(-0.9,0) 4(-0.9,-0.4) 5(-0.9,-0.8) 6(0.9,-0.8) 7(0.9,-0.4) 8(0.9,0) 9(0.9,0.4) 10(0.9,0.8)
  silkscreen extent -1,-1.17 0.25,1.25, body extent -1,-1 1,1, height 0.8
SOT23-3L [mm] "SOT23, 3-Leads, Body 2.9x1.3mm, Pitch 0.95mm, Lead Span 2.5mm, IPC High Density"
  rrect30% 0.8x0.6 smd: 1(-1,0.95) 2(-1,-0.95) 3(1,0)
  silkscreen extent -1.02,-1.5 0.7,1.92, body extent -0.7,-1.5 0.7,1.5, height 1.1
TWO_WIRE_HOLE_M0.9D3P [mm] "0.9mm diamateter holes, 3mm separation"
  rrect50% 1.7x2 hole 0.9: 1(-1.5,0)
  oval 1.7x2 hole 0.9: 2(1.5,0)
  silkscreen extent -2.65,-1.5 2.9,1.5
X-CKC_JS202011AQN [mm] "Slide Switch, DPDT, Thru hole, JS Series"
  oval 1.7x2 hole 0.9 copper offset 0,-0.2: A1(0,1.65) B1(-2.5,1.65) C1(2.5,1.65)
  oval 1.7x2 hole 0.9 copper offset 0,0.2: A2(0,-1.65) B2(-2.5,-1.65) C2(2.5,-1.65)
  silkscreen extent -4.5,-1.8 4.5,1.8, body extent -4.5,-3.8 4.5,1.8, height 3.5
X-EPSO_TSX-3225 [mm] "Miniature crystal unit"
  rect 1.15x1.4 smd: 1(-0.8,1.1) 2(-0.8,-1.1) 3(0.8,-1.1) 4(0.8,1.1)
  body extent -1.25,-1.6 1.25,1.6, height 0.6
x-FREE_2053-01(LGA8) [mm] "Case 2053-01, Issue O, LGA Package"
  rect 1.05x0.55 smd mask+0.1: 1(-1.075,1.875) 2(-1.075,0.625) 3(-1.075,-0.625) 4(-1.075,-1.875) 5(1.075,-1.875) 6(1.075,-0.625) 7(1.075,0.625) 8(1.075,1.875)
  silkscreen extent -2.08,-2.5 1.5,2.6, body extent -1.5,-2.5 1.5,2.5, height 1.11
X-JST-S2B-ZR [mm] "Header, 2 pos, 1.5mm pitch, Side Entry, TH"
  rect 1.1x1.4 hole 0.7: 1(-0.75,0)
  oval 1.1x1.4 hole 0.7: 2(0.75,0)
  silkscreen extent -2.25,-1.4 2.25,1.4, body extent -2.25,-4.6 2.25,1.4, height 3.7
X-JST-S3B-ZR [mm] "Header, 3 pos, 1.5mm pitch, Side Entry, TH"
  rect 1.1x1.4 hole 0.7: 1(-1.5,0)
  oval 1.1x1.4 hole 0.7: 2(0,0) 3(1.5,0)
  silkscreen extent -3,-1.4 3,1.4, body extent -3,-4.6 3,1.4, height 3.7
X-JST-S4B-ZR [mm] "Header, 4 pos, 1.5mm pitch, Side Entry, TH"
  rect 1.1x1.4 hole 0.7: 1(-2.25,0)
  oval 1.1x1.4 hole 0.7: 2(-0.75,0) 3(0.75,0) 4(2.25,0)
  silkscreen extent -3.75,-1.4 3.75,1.4, body extent -3.75,-4.6 3.75,1.4, height 3.7
X-JST-S6B-ZR [mm] "Header, 6 pos, 1.5mm pitch, Side Entry, TH"
  rect 1.1x1.4 hole 0.7: 1(-3.75,0)
  oval 1.1x1.4 hole 0.7: 2(-2.25,0) 3(-0.75,0) 4(0.75,0) 5(2.25,0) 6(3.75,0)
  silkscreen extent -5.25,-1.4 5.25,1.4, body extent -5.25,-4.6 5.25,1.4, height 3.7
X-JST-S8B-ZR [mm] "Header, 8 pos, 1.5mm pitch, Side Entry, TH"
  rect 1.1x1.4 hole 0.7: 1(-5.25,0)
  oval 1.1x1.4 hole 0.7: 2(-3.75,0) 3(-2.25,0) 4(-0.75,0) 5(0.75,0) 6(2.25,0) 7(3.75,0) 8(5.25,0)
  silkscreen extent -6.75,-1.4 6.75,1.4, body extent -6.75,-4.6 6.75,1.4, height 3.7
X-MOLX_472192001 [mm] "TFR Reader Hinge Type (Micro SD Card)"
  rect 0.8x1.5 smd: 1(-3.85,0) 2(-2.75,0) 3(-1.65,0) 4(-0.55,0) 5(0.55,0) 6(1.65,0) 7(2.75,0) 8(3.85,0)
  rect 1.45x2 smd: MOUNT1(6.23,-5.7) MOUNT2(6.23,2.6) MOUNT3(-7.52,2.6) MOUNT4(-7.52,-5.7)
  silkscreen extent -7.52,-9.65 6.23,4.85, body extent -8,-9.65 6.6,4.85, height 1.87
X-TDK_FLF3215 [mm] "SMD Inductor, Shielded"
  rrect50% 1.2x2 smd: 1(-1.6,0) 2(1.6,0)
  silkscreen extent -0.6,-0.9 0.6,0.9, body extent -1.6,-1.25 1.6,1.25, height 1.55

## Part data
+3.3 +5V +VBATT MVDD VDDC VDDs: library part TESTP_PWR_1mm, "Tespoint for Power Trace"
\RST AMISO AMOSI ASCK ASS BSNS0 BSNS1 DRX DTX ECHO ESS_EscConnector1 ESS_EscConnector2 ESS_EscConnector3 ESS_EscConnector4 ESS_EscConnector5 ESS_EscConnector6 ESS_EscConnector7 ESS_EscConnector8 INTa INTa2 INTIMU INTm NCE NCS NIRQ NRFV OSC1 PG PROBE SCLi SCLo SDAi SDAo: library part TESTP_SIG_1mm, "Tespoint"
B1 B2 B3: library part FERR_80/100M_0603_600m, "FERRITE CHIP 80 OHM 600MA 0603"
C1 C2 C6 C8 C9 C12 C13 C14 C15 C16 C30 C31 C32 C35 C36 C37 C38 C40 C41 C42: library part CAP_100n_0603_50V_Y5V, "CAP CER 0.1UF 50V Y5V 0603"
C3 C10 C11 C20 C29 C39: library part CAP_10u_1206_25V_Y5V, "CAP CER 10UF 25V Y5V 1206"
C4 C5 C7 C21 C22 C34: library part CAP_1u_0603_25V_X5R_10%, "CAP CER 1UF 25V 10% X5R 0603"
C17 C18: library part CAP_15p_0603_50V_NP0_5%, "CAP CER 15PF 50V 5% NP0 0603"
C19 C28 C33: library part CAP_15n_0603_50V_X7R_10%, "CAP CER 0.015UF 50V 10% X7R 0603"
C23: library part CAP_22u_1206_16V_X5R_10%, "CAP CER 22UF 16V 10% X5R 1206"
C24: library part CAP_680p_0603_50V_NP0_5%, "CAP CER 680PF 50V 5% NP0 0603"
D1: library part LED_GREEN_0603_530, "LED CHIPLED 570NM GREEN 0603 SMD"
D2: library part LED_RED_0603_628, "LED POINTLED 628NM SUPER RED SMD"
D3: library part LED_YELLOW_0603_587, "LED CHIPLED 587NM YLW 0603 SMD"
D4: library part LL4148, "DIODE SMALL SIG 100V 0.2A SOD80"
JP1 JP2: library part RES_0_0603_0W1_1%, "RES 0.0 OHM 1/10W JUMP 0603"
L1: library part IND_2u2_SMD_1A4_20%_3.2x2.5, "INDUCTOR 2.2UH 1.4A 20% SMD"
LS1: library part PIEZO_BUZZER_EXT, "Piezoelectric buzzer (soldered wire)"
MCUG SENSG: library part TESTP_GND_GREEN_1mm, "Ground Connection"
P1: library part CONN_MICRO_SD-4_MOUNT, "CONN MEMORY CARD R/A 8POS SMD"
P2: library part HEADER_3x1_1.5mm_ZH_TH, "CONN HEADER ZH SIDE 3POS 1.5MM"
P3: library part HEADER_4x2_100mil_F, "CONN HEADER FMAL 8PS .1\" DL GOLD"
P4: library part HEADER_5x2_50mil_U, "CONN HEADER 10POS DL UNSHRD SMD"
P5_EscConnector1 P5_EscConnector2 P5_EscConnector3 P5_EscConnector4 P5_EscConnector5 P5_EscConnector6 P5_EscConnector7 P5_EscConnector8: library part HEADER_6x1_1.5mm_ZH_TH, "CONN HEADER ZH SIDE 6POS 1.5MM"
P8: library part HEADER_8x1_1.5mm_ZH_TH, "CONN HEADER ZH SIDE 8POS 1.5MM"
P11 P13: library part HEADER_2x1_1.5mm_ZH_TH, "CONN HEADER ZH SIDE 2POS 1.5MM"
P14: library part HEADER_4x1_1.5mm_ZH_TH, "CONN HEADER ZH SIDE 4POS 1.5MM"
Q1 Q2 Q3 Q4 Q5: library part MMBT3904, "TRANSISTOR NPN 40V 0.2A SOT23"
R1 R2 R3 R11 R12 R13 R15 R16: library part RES_10K_0603_0W1_1%, "RES 10K OHM 1/10W 5% 0603"
R4 R5 R6 R7: library part RES_1K_0603_0W1_1%, "RES 1K OHM 1/10W 5% 0603"
R8 R9 R10: library part RES_150_0603_0W1_1%, "RES 150 OHM 1/10W 1% 0603 SMD"
R14 R19 R23 R24 R25 R26: library part RES_3K3_0603_0W1_1%, "RES 3.3K OHM 1/10W 1% 0603 SMD"
R17: library part RES_100_0603_0W1_1%, "RES 100 OHM 1/10W 5% 0603 SMD"
R18: library part RES_100K_0603_0W1_1%, "RES 100K OHM 1/10W 1% 0603 SMD"
R20: library part RES_118K_0603_0W1_1%, "RES 118K OHM 1/10W 1% 0603"
SW1 SW3 SW4: library part SW_TACT_7.1x6.6mm_S_A5_TH, "SWITCH TACTILE SPST-NO 0.05A 12V"
SW2: library part SW_SLIDE_DPDT_9x3.6mm_S_A2_TH, "SW SLIDE DPDT 6VDC 0.3A PCMNT"
U1: library part x-TI_TM4C1237H6PM, "MCU Tiva C-Series 64 Pin LQFP"
U2: library part x-TI_TPS62153, "3-17V 1A Step-Down Converter in 3x3 QFN Package"
U3: library part g-LREG_3V3_0A15_EN_SOT753, "150 mA LDO Linear Regulator, SOT23-5"
U4: "GYRO/ACCELEROMETER 6AXIS 24QFN"
U5: "XYZ Digital Magnetometer I2C"
U6: "IC ALTIMETER I2C VERSION 8LGA"
W1 W2 W3 W4: library part FIDUCIAL_DOT_IPC_MIN, "IPC Compliant Fiducial Dot (1mm/2mm)"
Y1: library part XTAL_20M_SMD_9p, "CRYSTAL 20MHZ 9PF SMD"

## Via types
v1: diameter 0.6, hole 0.3, Top Layer to Bottom Layer, 132 vias

## Nets (pads, with @x,y where several pads share a name; then routed paths per layer and width w, separated by ;. In a path a pad name is that pad's centre, name@x,y a point inside that pad or via, vN(x,y) a via of type N, cw(c..) or ccw(c..) an arc to the next point about the centre after c; other vN are vias at no path point)
+5V: +5V.1 C21.1 C23.1 D4.2 L1.2 LS1.1 P5_EscConnector1.2 P5_EscConnector2.2 P5_EscConnector3.2 P5_EscConnector4.2 P5_EscConnector5.2 P5_EscConnector6.2 P5_EscConnector7.2 P5_EscConnector8.2 P8.1 P14.1 R8.1 R9.1 R10.1 R18.1 R19.1 U2.7 U2.14 U3.1 U3.3 | length 46
  Top Layer w0.2: R8.1@-0.777,50.773 cw(c-1.204,50.346) -0.6,50.346 cw(c0.004,50.346) R8.1@-0.423,50.773 ; v1@-0.741,50.141 ccw(c-1.083,50.483) -0.6,50.483 ccw(c-0.117,50.483) v1@-0.459,50.141 ; v1(-0.6,50) R8.1@-0.6,51.05 ; v1(3.15,49.225) 3.524,49.599 3.524,50.2 R9.1@3.774,50.45 ; v1@3.15,49.425 ccw(c3.15,49.908) 3.491,49.566 ccw(c3.833,49.225) v1@3.35,49.225 ; 3.524,49.586 cw(c4.407,49.586) R9.1@3.836,50.259 ; 3.524,50.018 cw(c4.041,50.018) R9.1@3.707,50.412 ; v1@6.709,49.441 ccw(c6.367,49.783) 6.85,49.783 ccw(c7.333,49.783) v1@6.991,49.441 ; v1@6.75,49.473 ccw(c6.61,49.715) 6.88,49.643 ; v1(6.85,49.3) 6.85,50.219 R10.1@7.081,50.45 ; v1@6.85,49.53 cw(c7.901,49.53) R10.1@7.158,50.273 ; 6.85,50.013 cw(c7.418,50.013) R10.1@7.016,50.415 ; 6.955,49.921 ccw(c7.617,49.743) v1@7.023,49.4 ; v1(28.635,11.433) v1@28.883,11.433 ; C21.1@28.956,14.219 ccw(c28.455,13.727) 28.455,14.429 ; C21.1@28.956,14.639 cw(c28.455,15.131) 28.455,14.429 ; C21.1@29.22,14.429 28.455,14.429 ; R18.1@29.951,2.507 29.858,2.6 v1(30.9,2.6) v1@30.95,2.6 ; R18.1@30.087,2.471 cw(c30.397,2.161) R18.1@30.397,2.6 ; R18.1@30.228,2.33 cw(c30.88,1.678) v1@30.88,2.6 ; R18.1@30.228,2.684 ccw(c30.43,2.885) 30.43,2.6 ; 30.428,2.479 cw(c30.552,2.013) v1@30.798,2.428 ; 30.444,2.483 ccw(c30.324,2.933) v1@30.727,2.7 ; 30.464,14.382 U3.1@31.256,14.382 ; 30.55,12.1 30.589,12.1 30.971,12.482 U3.3@31.256,12.482 ; 30.595,12.106 cw(c31.081,11.62) U3.3@31.081,12.307 ; v1@30.759,2.459 ccw(c30.417,2.117) 30.417,2.6 ccw(c30.417,3.083) v1@30.759,2.741 ; U3.1@30.957,14.258 ccw(c30.658,13.959) 30.658,14.382 ccw(c30.658,14.804) U3.1@30.957,14.506 ; U2.7@32.296,5.046 32.296,4.354 ; U2.14@32.296,7.996 32.296,8.846 32.35,8.9 v1(32.475,8.9) ; 32.414,4.236 cw(c32.178,4) v1@32.512,4 ; v1@32.7,4.2 cw(c32.671,4.729) 32.296,4.354 ; v1(32.712,4) 32.65,4 32.296,4.354 ; R19.1@39.879,23.658 41.008,23.658 41.85,24.5 P14.1@42.054,24.5 ; R19.1@40.056,23.481 cw(c40.483,23.055) 40.483,23.658 cw(c40.483,24.262) R19.1@40.056,23.835 ; 41.044,23.694 cw(c41.904,22.833) P14.1@41.904,24.05 ; 41.174,23.824 ccw(c40.498,24.5) P14.1@41.454,24.5 ; P14.1@41.385,24.035 cw(c41.904,23.516) P14.1@41.904,24.25
  Top Layer w0.3: C21.1@28.918,14.382 30.464,14.382 ; C21.1@29.447,14.252 cw(c29.76,13.939) 29.76,14.382 ; C21.1@29.447,14.606 ccw(c29.988,15.146) 29.988,14.382
  Top Layer w0.4: LS1.1@4.619,41.15 5.182,41.712 D4.2@7.333,41.712 ; LS1.1@4.896,41.123 cw(c6.318,39.702) 6.318,41.712 ; D4.2@6.75,41.429 ccw(c6.067,40.746) 6.067,41.712 ccw(c6.067,42.678) D4.2@6.75,41.995 ; v1(27.95,11.625) 27.95,14.224 28.155,14.429 28.455,14.429 ; v1(28.635,11.433) 29.002,11.8 30.25,11.8 30.55,12.1
  Bottom Layer w0.2: v1(29.924,8.832) 29.992,8.9 v1(32.475,8.9) ; v1@30.065,8.691 cw(c30.571,8.185) 30.571,8.9 ; v1@30.065,8.974 ccw(c30.243,9.151) 30.243,8.9 ; v1@32.334,8.759 ccw(c31.992,8.417) 31.992,8.9 ccw(c31.992,9.383) v1@32.334,9.041
  other v1: 27.25,11.433 26.591,11.625
BATT_AUX: R3.1 SW2.A2 | length 9.8
  Top Layer w0.4: R3.1@39.673,12.319 cw(c39.417,12.063) 39.78,12.063 cw(c40.142,12.063) R3.1@39.886,12.319 ; R3.1@39.78,12.525 39.78,10.981 40.395,10.366 40.395,8.433 SW2.A2@42.095,6.733 ; 40.75,8.078 ccw(c41.945,9.273) SW2.A2@41.945,7.583 ; 40.871,7.957 cw(c39.846,6.933) SW2.A2@41.295,6.933
BATT_MAIN: +VBATT.1 C20.1 R2.1 SW2.A1 U2.10 U2.11 U2.12 U2.13 | length 31.7
  Top Layer w0.2: U2.13@32.796,7.996 32.796,8.372 33.075,8.651 33.442,8.651 34.363,7.731 34.363,7.271 ; U2.13@32.836,8.281 cw(c33.153,8.281) 32.929,8.505 ; U2.10@33.521,6.271 34.271,6.271 34.45,6.45 34.45,6.646 34.7,6.896 34.45,7.146 ; U2.11@33.521,6.771 34.421,6.771 34.45,6.8 34.45,7.146 ; U2.12@33.521,7.271 34.363,7.271 ; 34.363,7.271 34.45,7.184 34.45,7.146
  Top Layer w0.3: R2.1@35.641,12.21 cw(c35.641,11.486) 36.154,11.998 ; R2.1@35.641,12.51 36.501,11.65 37.104,11.65 37.5,11.254 37.5,8.028 SW2.A1@38.795,6.733 ; 37.902,7.626 ccw(c38.67,8.394) SW2.A1@38.871,7.326 ; 37.997,7.531 cw(c37.4,6.933) SW2.A1@38.245,6.933
  Top Layer w0.4: 34.7,6.896 35.521,6.896 35.771,6.646 C20.1@35.771,5.714 ; +VBATT.1@35.361,3.549 ccw(c34.252,4.658) 35.821,4.658 ccw(c37.39,4.658) +VBATT.1@36.281,3.549 ; C20.1@35.523,5.466 cw(c34.805,4.748) 35.821,4.748 ; C20.1@35.523,5.961 ccw(c34.926,6.559) 35.771,6.559 ccw(c36.616,6.559) C20.1@36.018,5.961 ; C20.1@35.771,5.413 C20.1@35.771,5.714 ; +VBATT.1@35.821,3.089 C20.1@35.821,5.463 ; 35.821,4.989 cw(c36.495,4.989) C20.1@36.018,5.466 ; C20.1@36.318,5.466 cw(c36.916,4.869) 36.916,5.714 cw(c36.916,6.559) C20.1@36.318,5.961 ; SW2.A1@38.795,6.733 37.775,5.714 C20.1@35.771,5.714
BATTM0: BSNS0.1 R2.2 R4.1 U1.8 | length 51.3
  Top Layer w0.2: v1(11.062,3.8) 11.05,3.8 11.208,3.958 U1.8@11.208,5.125 ; R2.2@36.965,12.787 ccw(c36.476,13.275) 37.167,13.275 ; R4.1@36.99,13.54 cw(c36.563,13.114) 37.167,13.114 cw(c37.77,13.114) R4.1@37.344,13.54 ; R2.2@37.141,12.51 37.167,12.535 R4.1@37.167,13.817 ; 37.167,13.152 ccw(c37.684,13.152) R2.2@37.318,12.787
  Top Layer w0.3: BSNS0.1@36.375,16.017 37.167,15.225 ; BSNS0.1@36.602,15.355 cw(c36.78,14.838) 37.167,15.225 ; R4.1@37.025,14.059 ccw(c36.684,14.4) 37.167,14.4 ccw(c37.65,14.4) R4.1@37.308,14.059 ; BSNS0.1@37.036,15.789 ccw(c37.553,15.611) 37.167,15.225 ; R4.1@37.167,13.817 37.167,15.225
  Bottom Layer w0.2: v1(11.062,3.8) 11.05,3.8 11.257,3.8 13.107,1.95 17.626,1.95 31.7,1.95 31.9,2.15
  Bottom Layer w0.3: 31.9,2.15 37.125,7.375 37.125,10.569 37.116,10.578 37.116,12.384 36.375,13.125 BSNS0.1@36.375,16.017 ; BSNS0.1@35.88,15.522 cw(c34.685,14.327) 36.375,14.327 cw(c38.064,14.327) BSNS0.1@36.87,15.522 ; BSNS0.1@36.092,15.734 cw(c35.409,15.051) 36.375,15.051 cw(c37.34,15.051) BSNS0.1@36.657,15.734
BATTM1: BSNS1.1 R3.2 R5.1 U1.9 | length 55.4
  Top Layer w0.2: v1@11.1,3.2 ccw(c11.1,3.85) 11.56,3.39 ; v1@11.185,3.015 11.708,3.539 U1.9@11.708,5.125 ; v1@11.3,3 cw(c11.616,3) 11.392,3.223 ; R3.2@38.103,12.802 ccw(c37.676,13.229) 38.28,13.229 ccw(c38.883,13.229) R3.2@38.456,12.802 ; R5.1@38.114,13.548 cw(c37.716,13.149) 38.28,13.149 ; R3.2@38.28,12.525 38.28,13.813 R5.1@38.291,13.825 ; 38.28,13.093 cw(c38.923,13.093) R5.1@38.468,13.548
  Top Layer w0.3: v1(11.1,3) 11.15,3.05 v1@11.185,3.015 ; R5.1@38.15,14.066 ccw(c37.836,14.38) 38.28,14.38 ; R5.1@38.28,13.813 38.28,15.097 ; 38.28,14.436 ccw(c38.802,14.436) R5.1@38.433,14.066 ; BSNS1.1@38.502,15.854 cw(c37.698,15.679) 38.28,15.097 ; BSNS1.1@39.036,15.319 ccw(c38.861,14.515) 38.28,15.097 ; BSNS1.1@39.186,16.003 38.28,15.097
  Bottom Layer w0.2: v1@11.1,2.8 cw(c11.1,2.076) 11.612,2.588 ; v1(11.1,3) 11.15,3.05 12.75,1.45 17.833,1.45 31.907,1.45 32.242,1.785 ; v1@11.3,3 ccw(c11.541,3) 11.371,2.829
  Bottom Layer w0.3: 32.242,1.785 37.625,7.168 37.625,12.325 39.186,13.886 BSNS1.1@39.186,16.003 ; BSNS1.1@38.691,15.508 cw(c37.496,14.313) 39.186,14.313 cw(c40.876,14.313) BSNS1.1@39.681,15.508 ; BSNS1.1@38.903,15.72 cw(c38.22,15.037) 39.186,15.037 cw(c40.151,15.037) BSNS1.1@39.468,15.72
BTN0: P4.6 SW4.2 U1.49 | length 68
  Top Layer w0.2: P4.6@3.677,30.227 cw(c4.094,29.81) 4.094,30.4 ; P4.6@3.677,30.609 ccw(c4.181,31.113) v1@4.181,30.4 ; 3.93,30.467 ccw(c4.033,30.852) v1@4.294,30.551 ; 4.09,30.424 cw(c4.021,30.166) v1@4.252,30.3 ; v1@4.2,30.4 P4.6@3.6,30.4 ; v1@4.284,30.541 cw(c3.943,30.883) 3.943,30.4 cw(c3.943,29.917) 4.284,30.259 cw(c3.627,29.602) 4.556,29.602 ; 4.556,30.085 ccw(c4.11,30.085) v1(4.425,30.4) 4.556,30.269 4.556,28.71 4.764,28.502 4.764,23.315 4.758,23.309 4.758,14.942 5.225,14.475 U1.49@5.858,14.475 ; U1.49@5.111,14.589 cw(c4.996,14.475) U1.49@5.158,14.475 ; P4.6@3.6,30.4 2.949,30.4 P4.6@2.931,30.418 3.582,30.418 P4.6@3.6,30.4
  Bottom Layer w0.3: 3.832,30.796 ccw(c4.425,31.389) v1@4.425,30.55 ; v1(4.425,30.4) 4.228,30.4 2.3,32.328 2.3,41.843 3.757,43.3 6.75,43.3 10.85,47.4 23.75,47.4 24.45,48.1 24.45,50.037 SW4.2@22.933,51.554 ; SW4.2@23.156,50.742 cw(c23.156,49.322) 24.161,50.326 ; SW4.2@23.556,51.442 ccw(c24.791,51.442) 23.918,50.569 ; SW4.2@23.856,51.442 ccw(c25.816,51.442) 24.43,50.057
BTN1: SW3.2 U1.7 | length 73.3
  Top Layer w0.2: v1@1.4,4.15 ccw(c0.917,4.15) 1.259,4.491 ccw(c1.6,4.833) v1@1.6,4.35 ; v1(1.6,4.15) 1.2,4.55 1.2,5.399 1.25,5.449 1.25,7.432 1.25,12.425 1.65,12.825 1.65,13.847 1.65,25.1 v1(2.4,25.85) ; v1@2.2,25.85 cw(c1.717,25.85) 2.059,25.509 cw(c2.4,25.167) v1@2.4,25.65 ; v1(10.25,3.819) 10.25,3.836 10.658,4.244 ; U1.7@10.669,4.443 cw(c10.553,4.35) 10.658,4.244 ; U1.7@10.708,5.125 10.658,5.075 10.658,4.244
  Bottom Layer w0.2: v1(1.6,4.15) 2,4.55 9.35,4.55 10.081,3.819 v1(10.25,3.819) cw(c10.25,4.228) 9.961,3.939 ; v1@1.6,4.35 ccw(c1.6,4.833) 1.941,4.491 ccw(c2.283,4.15) v1@1.8,4.15 ; 9.619,4.281 ccw(c10.25,4.911) v1@10.25,4.019
  Bottom Layer w0.3: v1@2.25,25.85 ccw(c1.888,25.85) 2.144,26.106 ccw(c2.4,26.362) v1@2.4,26 ; v1(2.4,25.85) 1.8,26.45 1.8,42.05 3.6,43.85 6.35,43.85 9.1,46.6 9.1,49.55 11.104,51.554 ; 11.268,51.554 cw(c11.268,50.246) SW3.2@12.192,51.171 ; 11.689,51.554 ccw(c11.689,52.383) SW3.2@12.362,51.899 ; SW3.2@12.119,52.074 cw(c11.104,52.804) 11.104,51.554 ; SW3.2@12.911,51.554 11.104,51.554
DBGLED0: P4.2 R11.2 U1.51 | length 42.7
  Top Layer w0.2: v1(1.05,13.55) 1.099,13.55 1.1,13.549 1.25,13.699 1.25,27.7 ; 1.25,39.2 1.25,28.057 ; P4.2@2.185,27.687 ccw(c1.724,27.226) 1.724,27.878 ccw(c1.724,28.53) P4.2@2.185,28.069 ; P4.2@2.801,27.749 P4.2@2.672,27.878 ; P4.2@2.931,27.878 P4.2@2.672,27.878 ; v1(4.151,13.792) 3.958,13.792 3.95,13.8 4.679,13.8 5.005,13.475 U1.51@5.858,13.475 ; v1@4.293,13.651 cw(c4.653,13.291) 4.653,13.8 ; v1@4.293,13.934 ccw(c4.616,14.256) 4.616,13.8 ; 1.25,27.7 1.428,27.878 1.305,27.878 1.25,27.933 ; 1.25,27.7 1.25,27.933 ; 1.25,27.933 1.25,28.057 ; 1.25,28.057 1.429,27.878 1.5,27.878 P4.2@2.672,27.878
  Top Layer w0.3: 1.25,39.2 1.25,42.419 2.275,43.444 R11.2@2.275,44.164 ; R11.2@2.134,44.022 cw(c1.792,43.681) 2.275,43.681 cw(c2.758,43.681) R11.2@2.416,44.022
  Bottom Layer w0.2: v1(1.05,13.55) v1(1.05,13.55) 1.199,13.549 1.45,13.8 ; v1@1.126,13.735 ccw(c1.239,14.011) 1.45,13.8 ; 3.65,13.8 cw(c3.65,13.291) v1@4.01,13.651 ; 3.687,13.8 ccw(c3.687,14.256) v1@4.01,13.934 ; v1(4.151,13.792) 4.144,13.8 3.6,13.8 1.45,13.8
DBGLED1: P4.8 R12.2 U1.50 | length 38.6
  Top Layer w0.2: 2.6,38.25 2.6,37.95 3.55,37 3.55,34.05 5.025,32.575 5.025,31.688 ; P4.8@2.931,31.688 5.025,31.688 ; P4.8@3.677,31.497 cw(c4.138,31.036) 4.138,31.688 cw(c4.138,32.34) P4.8@3.677,31.879 ; U1.50@5.858,13.975 5.908,14.025 6.739,14.025 ; U1.50@6.539,14.014 ccw(c6.633,14.13) 6.739,14.025 ; U1.50@6.545,13.941 cw(c6.739,13.759) 6.739,14.025 ; 5.025,31.688 5.025,28.844 5.164,28.706 5.164,23.149 5.158,23.143 5.158,15.332 5.44,15.05 6.613,15.05 6.958,14.705 6.958,14.244 6.739,14.025
  Top Layer w0.3: 2.6,38.25 2.6,41.85 4.128,43.378 R12.2@4.128,44.164 ; R12.2@3.987,44.022 cw(c3.645,43.681) 4.128,43.681 cw(c4.611,43.681) R12.2@4.269,44.022